# EAGLE board SparkFun_LilyPad-Button-Panel_v20 (EAGLE 7.7.0), part 1 of 3
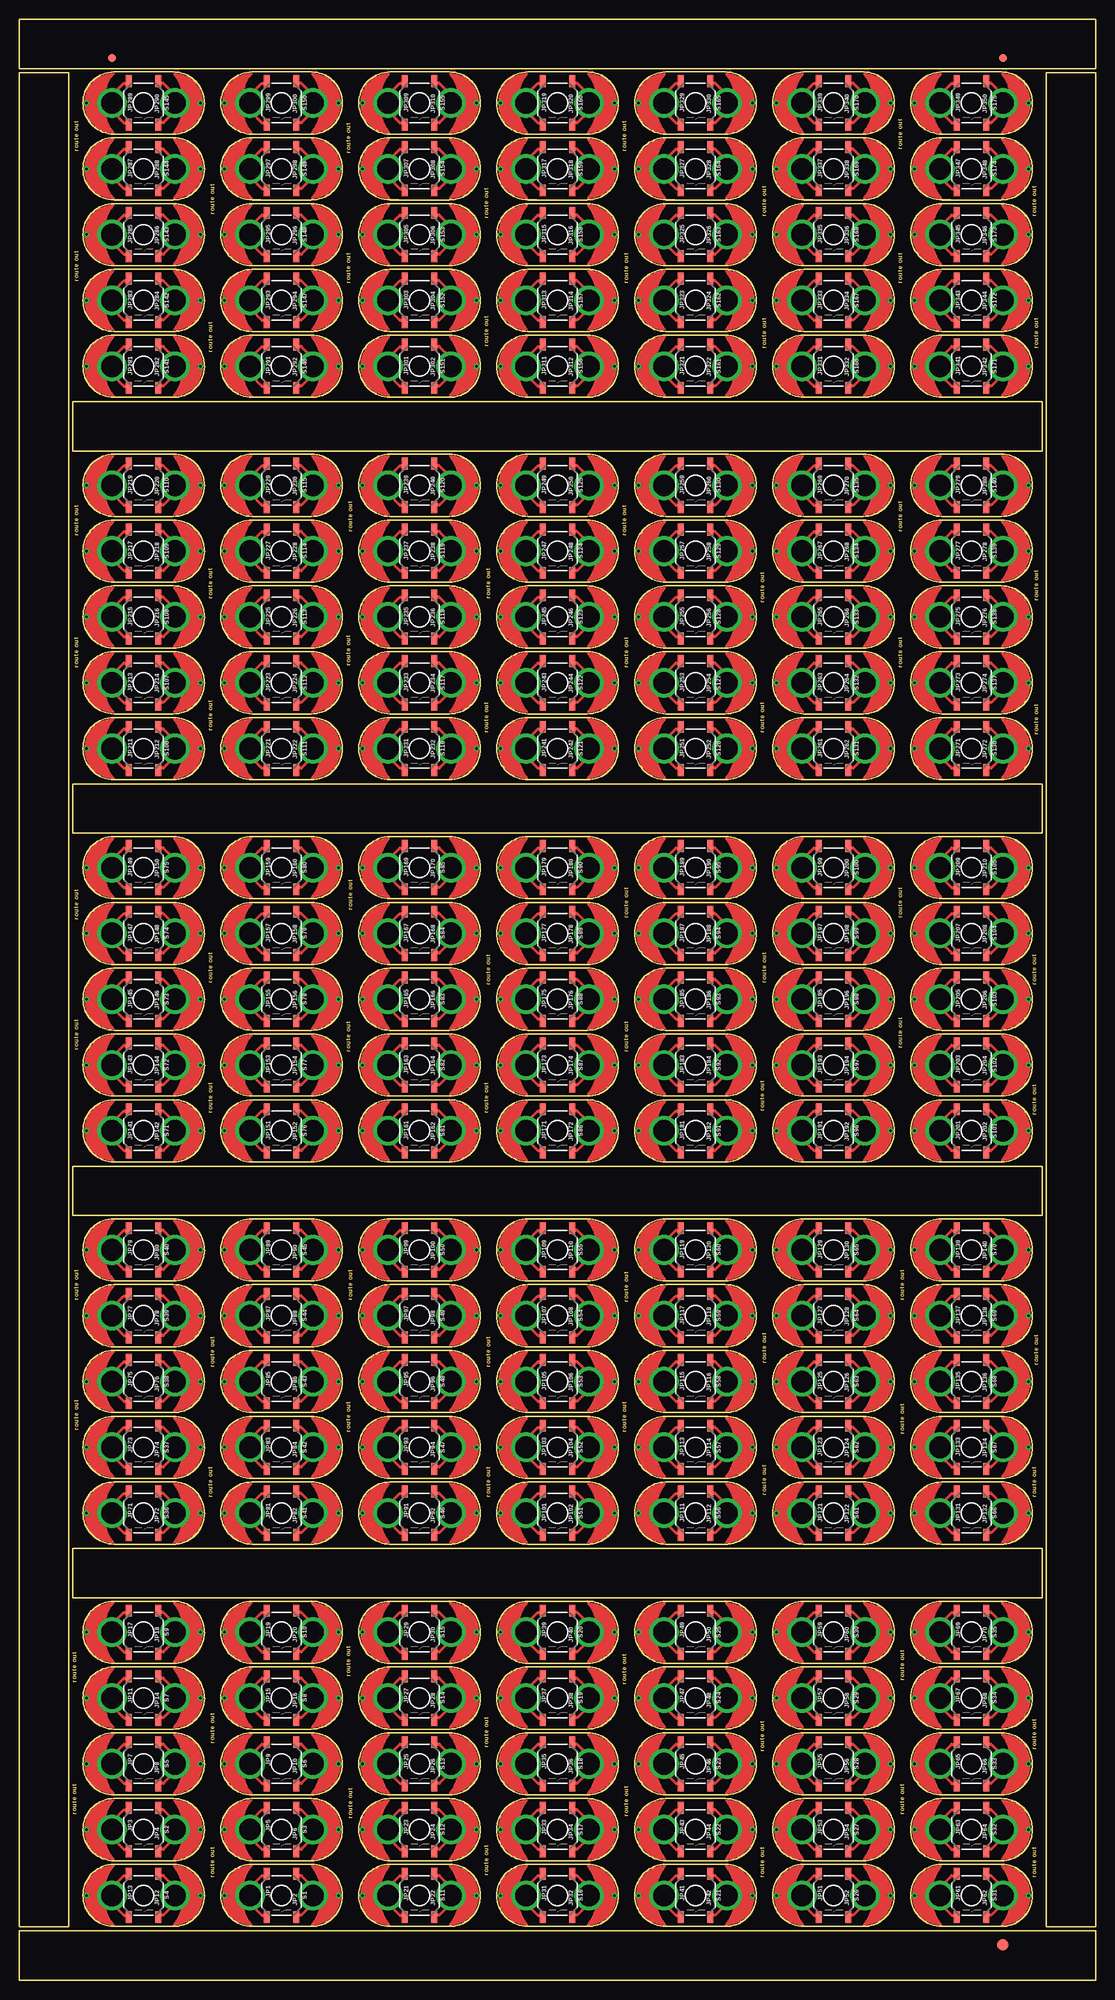
[diagram p0: board, top side]
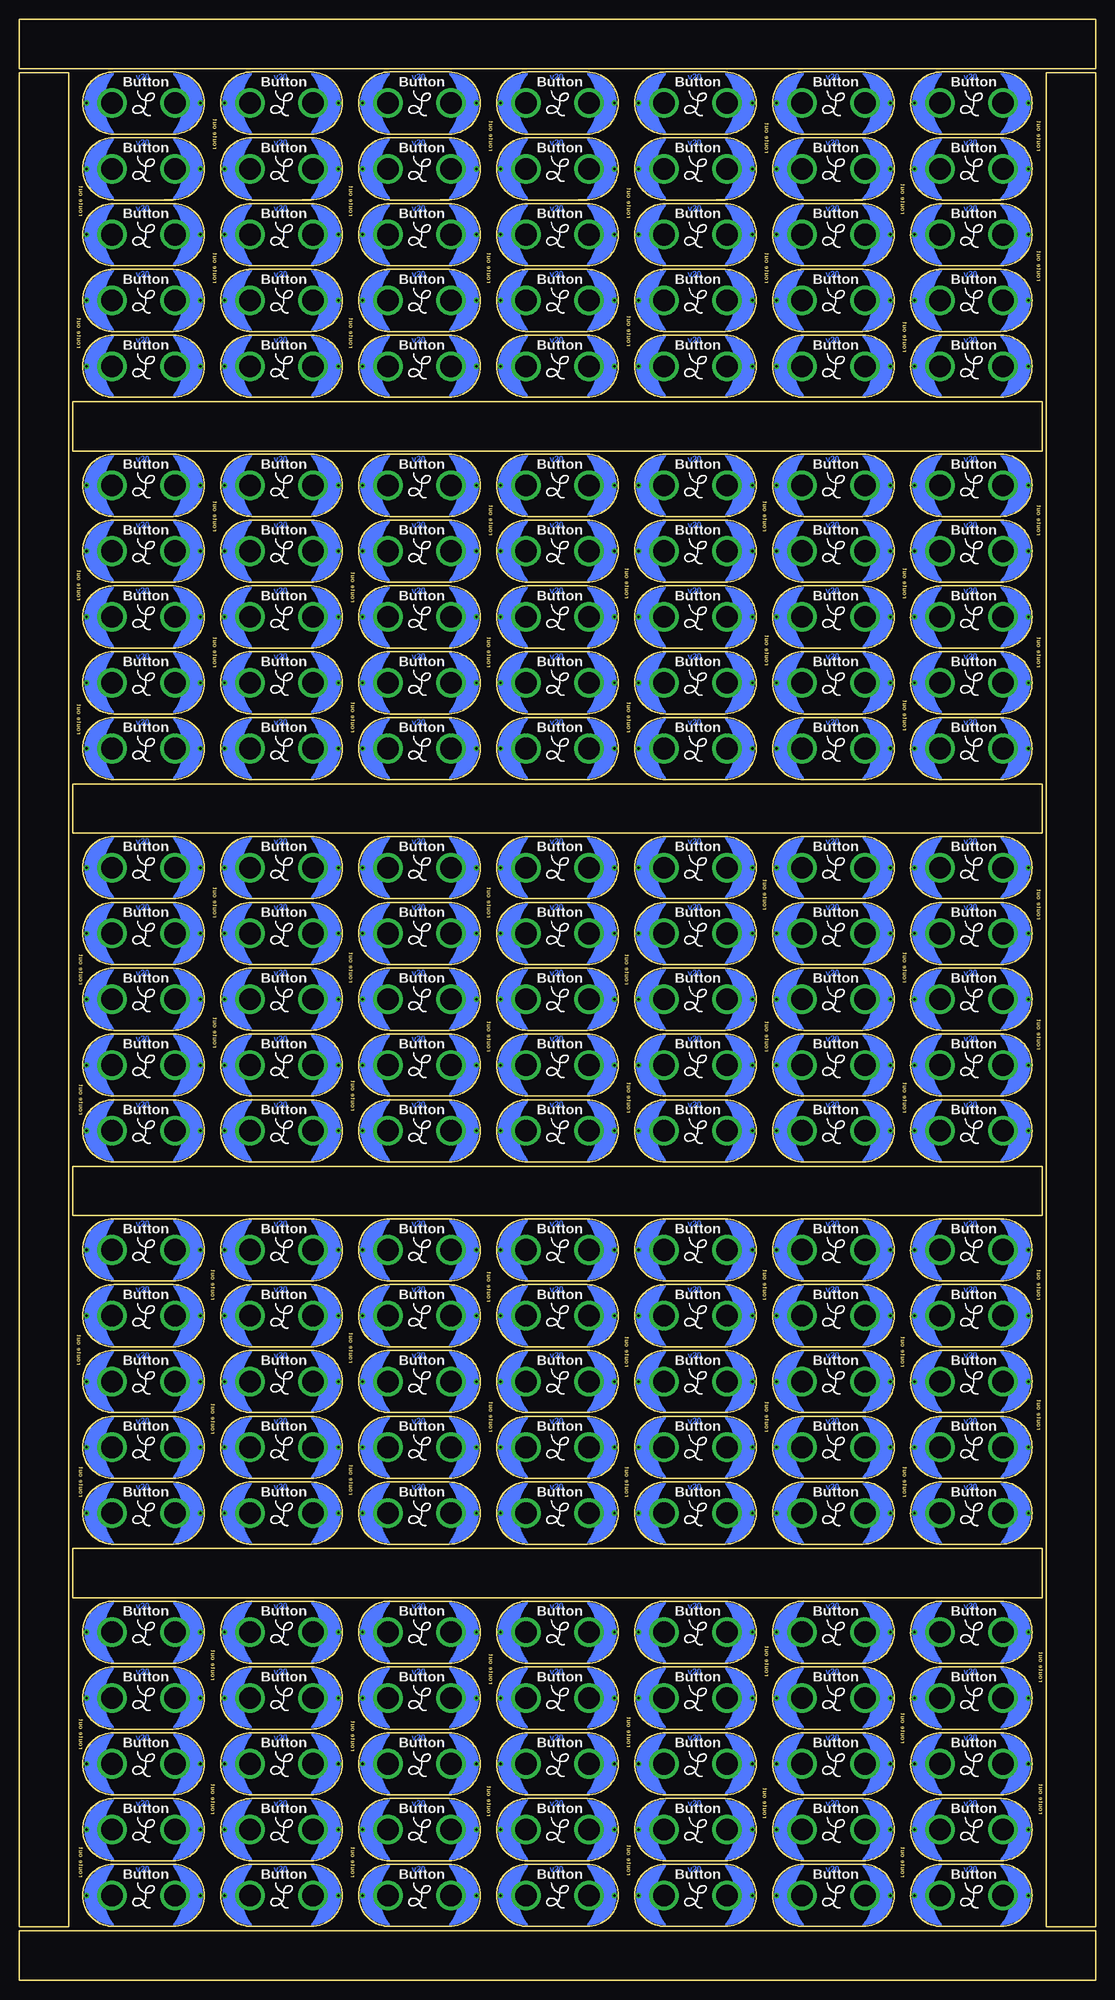
[diagram p1: board, bottom side, seen from below]

Size 138.68 x 252.73 mm. Coordinates in mm from the lower left corner, seen from the top.
Outline: 1798 segments
Copper layers (1*16): Top 0.035mm / dielectric 1.5mm / Bottom 0.035mm
Design rules "SparkFun-2-layer-TIGHT *": minimum track width 7mil, minimum drill 15mil, track to track 8mil, track to pad 8mil, pad to pad 8mil, via to via 8mil, smd to smd 8mil, copper to edge 7mil, drill to drill 7mil, minimum pad ring 7mil, minimum via ring 7mil, stop-mask expansion 4mil, vias tented up to drill 25mil, thermal gap 10mil

## Footprints (pad centres in the part's own frame; a part is rotated, then mirrored left to right if it is on the bottom)
FIDUCIAL-1.5X3 = smd 1.5 x 1.5: 1 0,0
FIDUCIAL-1X2 = smd 1 x 1: 1 0,0
PETAL-MEDIUM-2SIDE = drill 2.794: 1 0,-0.254
TACTILE_SWITCH_SMD_5.2MM = smd 1.524 x 0.762: 1 -2.794,1.905; 2 2.794,1.905; 3 -2.794,-1.905; 4 2.794,-1.905

## Placement (x,y rotation side)
E$1  [FIDUCIAL-1.5X3]  126.75,4.57 0 top
E$15  [FIDUCIAL-1X2]  11.94,247.78 270 top
E$16  [FIDUCIAL-1X2]  126.75,247.78 90 top
JP1  SEWTAP_MEDIUM-2SIDE  [PETAL-MEDIUM-2SIDE]  29.97,10.92 270 top
JP2  SEWTAP_MEDIUM-2SIDE  [PETAL-MEDIUM-2SIDE]  37.59,10.92 90 top
JP3  SEWTAP_MEDIUM-2SIDE  [PETAL-MEDIUM-2SIDE]  12.19,19.4 270 top
JP4  SEWTAP_MEDIUM-2SIDE  [PETAL-MEDIUM-2SIDE]  19.81,19.4 90 top
JP5  SEWTAP_MEDIUM-2SIDE  [PETAL-MEDIUM-2SIDE]  29.97,19.4 270 top
JP6  SEWTAP_MEDIUM-2SIDE  [PETAL-MEDIUM-2SIDE]  37.59,19.4 90 top
JP7  SEWTAP_MEDIUM-2SIDE  [PETAL-MEDIUM-2SIDE]  12.19,27.88 270 top
JP8  SEWTAP_MEDIUM-2SIDE  [PETAL-MEDIUM-2SIDE]  19.81,27.88 90 top
JP9  SEWTAP_MEDIUM-2SIDE  [PETAL-MEDIUM-2SIDE]  29.97,27.88 270 top
JP10  SEWTAP_MEDIUM-2SIDE  [PETAL-MEDIUM-2SIDE]  37.59,27.88 90 top
JP11  SEWTAP_MEDIUM-2SIDE  [PETAL-MEDIUM-2SIDE]  12.19,36.36 270 top
JP12  SEWTAP_MEDIUM-2SIDE  [PETAL-MEDIUM-2SIDE]  19.81,10.92 90 top
JP13  SEWTAP_MEDIUM-2SIDE  [PETAL-MEDIUM-2SIDE]  12.19,10.92 270 top
JP14  SEWTAP_MEDIUM-2SIDE  [PETAL-MEDIUM-2SIDE]  19.81,36.36 90 top
JP15  SEWTAP_MEDIUM-2SIDE  [PETAL-MEDIUM-2SIDE]  29.97,36.36 270 top
JP16  SEWTAP_MEDIUM-2SIDE  [PETAL-MEDIUM-2SIDE]  37.59,36.36 90 top
JP17  SEWTAP_MEDIUM-2SIDE  [PETAL-MEDIUM-2SIDE]  12.19,44.84 270 top
JP18  SEWTAP_MEDIUM-2SIDE  [PETAL-MEDIUM-2SIDE]  19.81,44.84 90 top
JP19  SEWTAP_MEDIUM-2SIDE  [PETAL-MEDIUM-2SIDE]  29.97,44.84 270 top
JP20  SEWTAP_MEDIUM-2SIDE  [PETAL-MEDIUM-2SIDE]  37.59,44.84 90 top
JP21  SEWTAP_MEDIUM-2SIDE  [PETAL-MEDIUM-2SIDE]  47.75,10.92 270 top
JP22  SEWTAP_MEDIUM-2SIDE  [PETAL-MEDIUM-2SIDE]  55.37,10.92 90 top
JP23  SEWTAP_MEDIUM-2SIDE  [PETAL-MEDIUM-2SIDE]  47.75,19.4 270 top
JP24  SEWTAP_MEDIUM-2SIDE  [PETAL-MEDIUM-2SIDE]  55.37,19.4 90 top
JP25  SEWTAP_MEDIUM-2SIDE  [PETAL-MEDIUM-2SIDE]  47.75,27.88 270 top
JP26  SEWTAP_MEDIUM-2SIDE  [PETAL-MEDIUM-2SIDE]  55.37,27.88 90 top
JP27  SEWTAP_MEDIUM-2SIDE  [PETAL-MEDIUM-2SIDE]  47.75,36.36 270 top
JP28  SEWTAP_MEDIUM-2SIDE  [PETAL-MEDIUM-2SIDE]  55.37,36.36 90 top
JP29  SEWTAP_MEDIUM-2SIDE  [PETAL-MEDIUM-2SIDE]  47.75,44.84 270 top
JP30  SEWTAP_MEDIUM-2SIDE  [PETAL-MEDIUM-2SIDE]  55.37,44.84 90 top
JP31  SEWTAP_MEDIUM-2SIDE  [PETAL-MEDIUM-2SIDE]  65.53,10.92 270 top
JP32  SEWTAP_MEDIUM-2SIDE  [PETAL-MEDIUM-2SIDE]  73.15,10.92 90 top
JP33  SEWTAP_MEDIUM-2SIDE  [PETAL-MEDIUM-2SIDE]  65.53,19.4 270 top
JP34  SEWTAP_MEDIUM-2SIDE  [PETAL-MEDIUM-2SIDE]  73.15,19.4 90 top
JP35  SEWTAP_MEDIUM-2SIDE  [PETAL-MEDIUM-2SIDE]  65.53,27.88 270 top
JP36  SEWTAP_MEDIUM-2SIDE  [PETAL-MEDIUM-2SIDE]  73.15,27.88 90 top
JP37  SEWTAP_MEDIUM-2SIDE  [PETAL-MEDIUM-2SIDE]  65.53,36.36 270 top
JP38  SEWTAP_MEDIUM-2SIDE  [PETAL-MEDIUM-2SIDE]  73.15,36.36 90 top
JP39  SEWTAP_MEDIUM-2SIDE  [PETAL-MEDIUM-2SIDE]  65.53,44.84 270 top
JP40  SEWTAP_MEDIUM-2SIDE  [PETAL-MEDIUM-2SIDE]  73.15,44.84 90 top
JP41  SEWTAP_MEDIUM-2SIDE  [PETAL-MEDIUM-2SIDE]  83.31,10.92 270 top
JP42  SEWTAP_MEDIUM-2SIDE  [PETAL-MEDIUM-2SIDE]  90.93,10.92 90 top
JP43  SEWTAP_MEDIUM-2SIDE  [PETAL-MEDIUM-2SIDE]  83.31,19.4 270 top
JP44  SEWTAP_MEDIUM-2SIDE  [PETAL-MEDIUM-2SIDE]  90.93,19.4 90 top
JP45  SEWTAP_MEDIUM-2SIDE  [PETAL-MEDIUM-2SIDE]  83.31,27.88 270 top
JP46  SEWTAP_MEDIUM-2SIDE  [PETAL-MEDIUM-2SIDE]  90.93,27.88 90 top
JP47  SEWTAP_MEDIUM-2SIDE  [PETAL-MEDIUM-2SIDE]  83.31,36.36 270 top
JP48  SEWTAP_MEDIUM-2SIDE  [PETAL-MEDIUM-2SIDE]  90.93,36.36 90 top
JP49  SEWTAP_MEDIUM-2SIDE  [PETAL-MEDIUM-2SIDE]  83.31,44.84 270 top
JP50  SEWTAP_MEDIUM-2SIDE  [PETAL-MEDIUM-2SIDE]  90.93,44.84 90 top
JP51  SEWTAP_MEDIUM-2SIDE  [PETAL-MEDIUM-2SIDE]  101.09,10.92 270 top
JP52  SEWTAP_MEDIUM-2SIDE  [PETAL-MEDIUM-2SIDE]  108.71,10.92 90 top
JP53  SEWTAP_MEDIUM-2SIDE  [PETAL-MEDIUM-2SIDE]  101.09,19.4 270 top
JP54  SEWTAP_MEDIUM-2SIDE  [PETAL-MEDIUM-2SIDE]  108.71,19.4 90 top
JP55  SEWTAP_MEDIUM-2SIDE  [PETAL-MEDIUM-2SIDE]  101.09,27.88 270 top
JP56  SEWTAP_MEDIUM-2SIDE  [PETAL-MEDIUM-2SIDE]  108.71,27.88 90 top
JP57  SEWTAP_MEDIUM-2SIDE  [PETAL-MEDIUM-2SIDE]  101.09,36.36 270 top
JP58  SEWTAP_MEDIUM-2SIDE  [PETAL-MEDIUM-2SIDE]  108.71,36.36 90 top
JP59  SEWTAP_MEDIUM-2SIDE  [PETAL-MEDIUM-2SIDE]  101.09,44.84 270 top
JP60  SEWTAP_MEDIUM-2SIDE  [PETAL-MEDIUM-2SIDE]  108.71,44.84 90 top
JP61  SEWTAP_MEDIUM-2SIDE  [PETAL-MEDIUM-2SIDE]  118.87,10.92 270 top
JP62  SEWTAP_MEDIUM-2SIDE  [PETAL-MEDIUM-2SIDE]  126.49,10.92 90 top
JP63  SEWTAP_MEDIUM-2SIDE  [PETAL-MEDIUM-2SIDE]  118.87,19.4 270 top
JP64  SEWTAP_MEDIUM-2SIDE  [PETAL-MEDIUM-2SIDE]  126.49,19.4 90 top
JP65  SEWTAP_MEDIUM-2SIDE  [PETAL-MEDIUM-2SIDE]  118.87,27.88 270 top
JP66  SEWTAP_MEDIUM-2SIDE  [PETAL-MEDIUM-2SIDE]  126.49,27.88 90 top
JP67  SEWTAP_MEDIUM-2SIDE  [PETAL-MEDIUM-2SIDE]  118.87,36.36 270 top
JP68  SEWTAP_MEDIUM-2SIDE  [PETAL-MEDIUM-2SIDE]  126.49,36.36 90 top
JP69  SEWTAP_MEDIUM-2SIDE  [PETAL-MEDIUM-2SIDE]  118.87,44.84 270 top
JP70  SEWTAP_MEDIUM-2SIDE  [PETAL-MEDIUM-2SIDE]  126.49,44.84 90 top
JP71  SEWTAP_MEDIUM-2SIDE  [PETAL-MEDIUM-2SIDE]  12.19,60.19 270 top
JP72  SEWTAP_MEDIUM-2SIDE  [PETAL-MEDIUM-2SIDE]  19.81,60.19 90 top
JP73  SEWTAP_MEDIUM-2SIDE  [PETAL-MEDIUM-2SIDE]  12.19,68.67 270 top
JP74  SEWTAP_MEDIUM-2SIDE  [PETAL-MEDIUM-2SIDE]  19.81,68.67 90 top
JP75  SEWTAP_MEDIUM-2SIDE  [PETAL-MEDIUM-2SIDE]  12.19,77.16 270 top
JP76  SEWTAP_MEDIUM-2SIDE  [PETAL-MEDIUM-2SIDE]  19.81,77.16 90 top
JP77  SEWTAP_MEDIUM-2SIDE  [PETAL-MEDIUM-2SIDE]  12.19,85.64 270 top
JP78  SEWTAP_MEDIUM-2SIDE  [PETAL-MEDIUM-2SIDE]  19.81,85.64 90 top
JP79  SEWTAP_MEDIUM-2SIDE  [PETAL-MEDIUM-2SIDE]  12.19,94.12 270 top
JP80  SEWTAP_MEDIUM-2SIDE  [PETAL-MEDIUM-2SIDE]  19.81,94.12 90 top
JP81  SEWTAP_MEDIUM-2SIDE  [PETAL-MEDIUM-2SIDE]  29.97,60.19 270 top
JP82  SEWTAP_MEDIUM-2SIDE  [PETAL-MEDIUM-2SIDE]  37.59,60.19 90 top
JP83  SEWTAP_MEDIUM-2SIDE  [PETAL-MEDIUM-2SIDE]  29.97,68.67 270 top
JP84  SEWTAP_MEDIUM-2SIDE  [PETAL-MEDIUM-2SIDE]  37.59,68.67 90 top
JP85  SEWTAP_MEDIUM-2SIDE  [PETAL-MEDIUM-2SIDE]  29.97,77.16 270 top
JP86  SEWTAP_MEDIUM-2SIDE  [PETAL-MEDIUM-2SIDE]  37.59,77.16 90 top
JP87  SEWTAP_MEDIUM-2SIDE  [PETAL-MEDIUM-2SIDE]  29.97,85.64 270 top
JP88  SEWTAP_MEDIUM-2SIDE  [PETAL-MEDIUM-2SIDE]  37.59,85.64 90 top
JP89  SEWTAP_MEDIUM-2SIDE  [PETAL-MEDIUM-2SIDE]  29.97,94.12 270 top
JP90  SEWTAP_MEDIUM-2SIDE  [PETAL-MEDIUM-2SIDE]  37.59,94.12 90 top
JP91  SEWTAP_MEDIUM-2SIDE  [PETAL-MEDIUM-2SIDE]  47.75,60.19 270 top
JP92  SEWTAP_MEDIUM-2SIDE  [PETAL-MEDIUM-2SIDE]  55.37,60.19 90 top
JP93  SEWTAP_MEDIUM-2SIDE  [PETAL-MEDIUM-2SIDE]  47.75,68.67 270 top
JP94  SEWTAP_MEDIUM-2SIDE  [PETAL-MEDIUM-2SIDE]  55.37,68.67 90 top
JP95  SEWTAP_MEDIUM-2SIDE  [PETAL-MEDIUM-2SIDE]  47.75,77.16 270 top
JP96  SEWTAP_MEDIUM-2SIDE  [PETAL-MEDIUM-2SIDE]  55.37,77.16 90 top
JP97  SEWTAP_MEDIUM-2SIDE  [PETAL-MEDIUM-2SIDE]  47.75,85.64 270 top
JP98  SEWTAP_MEDIUM-2SIDE  [PETAL-MEDIUM-2SIDE]  55.37,85.64 90 top
JP99  SEWTAP_MEDIUM-2SIDE  [PETAL-MEDIUM-2SIDE]  47.75,94.12 270 top
JP100  SEWTAP_MEDIUM-2SIDE  [PETAL-MEDIUM-2SIDE]  55.37,94.12 90 top
JP101  SEWTAP_MEDIUM-2SIDE  [PETAL-MEDIUM-2SIDE]  65.53,60.19 270 top
JP102  SEWTAP_MEDIUM-2SIDE  [PETAL-MEDIUM-2SIDE]  73.15,60.19 90 top
JP103  SEWTAP_MEDIUM-2SIDE  [PETAL-MEDIUM-2SIDE]  65.53,68.67 270 top
JP104  SEWTAP_MEDIUM-2SIDE  [PETAL-MEDIUM-2SIDE]  73.15,68.67 90 top
JP105  SEWTAP_MEDIUM-2SIDE  [PETAL-MEDIUM-2SIDE]  65.53,77.16 270 top
JP106  SEWTAP_MEDIUM-2SIDE  [PETAL-MEDIUM-2SIDE]  73.15,77.16 90 top
JP107  SEWTAP_MEDIUM-2SIDE  [PETAL-MEDIUM-2SIDE]  65.53,85.64 270 top
JP108  SEWTAP_MEDIUM-2SIDE  [PETAL-MEDIUM-2SIDE]  73.15,85.64 90 top
JP109  SEWTAP_MEDIUM-2SIDE  [PETAL-MEDIUM-2SIDE]  65.53,94.12 270 top
JP110  SEWTAP_MEDIUM-2SIDE  [PETAL-MEDIUM-2SIDE]  73.15,94.12 90 top
JP111  SEWTAP_MEDIUM-2SIDE  [PETAL-MEDIUM-2SIDE]  83.31,60.19 270 top
JP112  SEWTAP_MEDIUM-2SIDE  [PETAL-MEDIUM-2SIDE]  90.93,60.19 90 top
JP113  SEWTAP_MEDIUM-2SIDE  [PETAL-MEDIUM-2SIDE]  83.31,68.67 270 top
JP114  SEWTAP_MEDIUM-2SIDE  [PETAL-MEDIUM-2SIDE]  90.93,68.67 90 top
JP115  SEWTAP_MEDIUM-2SIDE  [PETAL-MEDIUM-2SIDE]  83.31,77.16 270 top
JP116  SEWTAP_MEDIUM-2SIDE  [PETAL-MEDIUM-2SIDE]  90.93,77.16 90 top
JP117  SEWTAP_MEDIUM-2SIDE  [PETAL-MEDIUM-2SIDE]  83.31,85.64 270 top
JP118  SEWTAP_MEDIUM-2SIDE  [PETAL-MEDIUM-2SIDE]  90.93,85.64 90 top
JP119  SEWTAP_MEDIUM-2SIDE  [PETAL-MEDIUM-2SIDE]  83.31,94.12 270 top
JP120  SEWTAP_MEDIUM-2SIDE  [PETAL-MEDIUM-2SIDE]  90.93,94.12 90 top
JP121  SEWTAP_MEDIUM-2SIDE  [PETAL-MEDIUM-2SIDE]  101.09,60.19 270 top
JP122  SEWTAP_MEDIUM-2SIDE  [PETAL-MEDIUM-2SIDE]  108.71,60.19 90 top
JP123  SEWTAP_MEDIUM-2SIDE  [PETAL-MEDIUM-2SIDE]  101.09,68.67 270 top
JP124  SEWTAP_MEDIUM-2SIDE  [PETAL-MEDIUM-2SIDE]  108.71,68.67 90 top
JP125  SEWTAP_MEDIUM-2SIDE  [PETAL-MEDIUM-2SIDE]  101.09,77.16 270 top
JP126  SEWTAP_MEDIUM-2SIDE  [PETAL-MEDIUM-2SIDE]  108.71,77.16 90 top
JP127  SEWTAP_MEDIUM-2SIDE  [PETAL-MEDIUM-2SIDE]  101.09,85.64 270 top
JP128  SEWTAP_MEDIUM-2SIDE  [PETAL-MEDIUM-2SIDE]  108.71,85.64 90 top
JP129  SEWTAP_MEDIUM-2SIDE  [PETAL-MEDIUM-2SIDE]  101.09,94.12 270 top
JP130  SEWTAP_MEDIUM-2SIDE  [PETAL-MEDIUM-2SIDE]  108.71,94.12 90 top
JP131  SEWTAP_MEDIUM-2SIDE  [PETAL-MEDIUM-2SIDE]  118.87,60.19 270 top
JP132  SEWTAP_MEDIUM-2SIDE  [PETAL-MEDIUM-2SIDE]  126.49,60.19 90 top
JP133  SEWTAP_MEDIUM-2SIDE  [PETAL-MEDIUM-2SIDE]  118.87,68.67 270 top
JP134  SEWTAP_MEDIUM-2SIDE  [PETAL-MEDIUM-2SIDE]  126.49,68.67 90 top
JP135  SEWTAP_MEDIUM-2SIDE  [PETAL-MEDIUM-2SIDE]  118.87,77.16 270 top
JP136  SEWTAP_MEDIUM-2SIDE  [PETAL-MEDIUM-2SIDE]  126.49,77.16 90 top
JP137  SEWTAP_MEDIUM-2SIDE  [PETAL-MEDIUM-2SIDE]  118.87,85.64 270 top
JP138  SEWTAP_MEDIUM-2SIDE  [PETAL-MEDIUM-2SIDE]  126.49,85.64 90 top
JP139  SEWTAP_MEDIUM-2SIDE  [PETAL-MEDIUM-2SIDE]  118.87,94.12 270 top
JP140  SEWTAP_MEDIUM-2SIDE  [PETAL-MEDIUM-2SIDE]  126.49,94.12 90 top
JP141  SEWTAP_MEDIUM-2SIDE  [PETAL-MEDIUM-2SIDE]  12.19,109.47 270 top
JP142  SEWTAP_MEDIUM-2SIDE  [PETAL-MEDIUM-2SIDE]  19.81,109.47 90 top
JP143  SEWTAP_MEDIUM-2SIDE  [PETAL-MEDIUM-2SIDE]  12.19,117.95 270 top
JP144  SEWTAP_MEDIUM-2SIDE  [PETAL-MEDIUM-2SIDE]  19.81,117.95 90 top
JP145  SEWTAP_MEDIUM-2SIDE  [PETAL-MEDIUM-2SIDE]  12.19,126.43 270 top
JP146  SEWTAP_MEDIUM-2SIDE  [PETAL-MEDIUM-2SIDE]  19.81,126.43 90 top
JP147  SEWTAP_MEDIUM-2SIDE  [PETAL-MEDIUM-2SIDE]  12.19,134.91 270 top
JP148  SEWTAP_MEDIUM-2SIDE  [PETAL-MEDIUM-2SIDE]  19.81,134.91 90 top
JP149  SEWTAP_MEDIUM-2SIDE  [PETAL-MEDIUM-2SIDE]  12.19,143.39 270 top
JP150  SEWTAP_MEDIUM-2SIDE  [PETAL-MEDIUM-2SIDE]  19.81,143.39 90 top
JP151  SEWTAP_MEDIUM-2SIDE  [PETAL-MEDIUM-2SIDE]  29.97,109.47 270 top
JP152  SEWTAP_MEDIUM-2SIDE  [PETAL-MEDIUM-2SIDE]  37.59,109.47 90 top
JP153  SEWTAP_MEDIUM-2SIDE  [PETAL-MEDIUM-2SIDE]  29.97,117.95 270 top
JP154  SEWTAP_MEDIUM-2SIDE  [PETAL-MEDIUM-2SIDE]  37.59,117.95 90 top
JP155  SEWTAP_MEDIUM-2SIDE  [PETAL-MEDIUM-2SIDE]  29.97,126.43 270 top
JP156  SEWTAP_MEDIUM-2SIDE  [PETAL-MEDIUM-2SIDE]  37.59,126.43 90 top
JP157  SEWTAP_MEDIUM-2SIDE  [PETAL-MEDIUM-2SIDE]  29.97,134.91 270 top
JP158  SEWTAP_MEDIUM-2SIDE  [PETAL-MEDIUM-2SIDE]  37.59,134.91 90 top
JP159  SEWTAP_MEDIUM-2SIDE  [PETAL-MEDIUM-2SIDE]  29.97,143.39 270 top
JP160  SEWTAP_MEDIUM-2SIDE  [PETAL-MEDIUM-2SIDE]  37.59,143.39 90 top
JP161  SEWTAP_MEDIUM-2SIDE  [PETAL-MEDIUM-2SIDE]  47.75,109.47 270 top
JP162  SEWTAP_MEDIUM-2SIDE  [PETAL-MEDIUM-2SIDE]  55.37,109.47 90 top
JP163  SEWTAP_MEDIUM-2SIDE  [PETAL-MEDIUM-2SIDE]  47.75,117.95 270 top
JP164  SEWTAP_MEDIUM-2SIDE  [PETAL-MEDIUM-2SIDE]  55.37,117.95 90 top
JP165  SEWTAP_MEDIUM-2SIDE  [PETAL-MEDIUM-2SIDE]  47.75,126.43 270 top
JP166  SEWTAP_MEDIUM-2SIDE  [PETAL-MEDIUM-2SIDE]  55.37,126.43 90 top
JP167  SEWTAP_MEDIUM-2SIDE  [PETAL-MEDIUM-2SIDE]  47.75,134.91 270 top
JP168  SEWTAP_MEDIUM-2SIDE  [PETAL-MEDIUM-2SIDE]  55.37,134.91 90 top
JP169  SEWTAP_MEDIUM-2SIDE  [PETAL-MEDIUM-2SIDE]  47.75,143.39 270 top
JP170  SEWTAP_MEDIUM-2SIDE  [PETAL-MEDIUM-2SIDE]  55.37,143.39 90 top
JP171  SEWTAP_MEDIUM-2SIDE  [PETAL-MEDIUM-2SIDE]  65.53,109.47 270 top
JP172  SEWTAP_MEDIUM-2SIDE  [PETAL-MEDIUM-2SIDE]  73.15,109.47 90 top
JP173  SEWTAP_MEDIUM-2SIDE  [PETAL-MEDIUM-2SIDE]  65.53,117.95 270 top
JP174  SEWTAP_MEDIUM-2SIDE  [PETAL-MEDIUM-2SIDE]  73.15,117.95 90 top
JP175  SEWTAP_MEDIUM-2SIDE  [PETAL-MEDIUM-2SIDE]  65.53,126.43 270 top
JP176  SEWTAP_MEDIUM-2SIDE  [PETAL-MEDIUM-2SIDE]  73.15,126.43 90 top
JP177  SEWTAP_MEDIUM-2SIDE  [PETAL-MEDIUM-2SIDE]  65.53,134.91 270 top
JP178  SEWTAP_MEDIUM-2SIDE  [PETAL-MEDIUM-2SIDE]  73.15,134.91 90 top
JP179  SEWTAP_MEDIUM-2SIDE  [PETAL-MEDIUM-2SIDE]  65.53,143.39 270 top
JP180  SEWTAP_MEDIUM-2SIDE  [PETAL-MEDIUM-2SIDE]  73.15,143.39 90 top
JP181  SEWTAP_MEDIUM-2SIDE  [PETAL-MEDIUM-2SIDE]  83.31,109.47 270 top
JP182  SEWTAP_MEDIUM-2SIDE  [PETAL-MEDIUM-2SIDE]  90.93,109.47 90 top
JP183  SEWTAP_MEDIUM-2SIDE  [PETAL-MEDIUM-2SIDE]  83.31,117.95 270 top
JP184  SEWTAP_MEDIUM-2SIDE  [PETAL-MEDIUM-2SIDE]  90.93,117.95 90 top
JP185  SEWTAP_MEDIUM-2SIDE  [PETAL-MEDIUM-2SIDE]  83.31,126.43 270 top
JP186  SEWTAP_MEDIUM-2SIDE  [PETAL-MEDIUM-2SIDE]  90.93,126.43 90 top
JP187  SEWTAP_MEDIUM-2SIDE  [PETAL-MEDIUM-2SIDE]  83.31,134.91 270 top
JP188  SEWTAP_MEDIUM-2SIDE  [PETAL-MEDIUM-2SIDE]  90.93,134.91 90 top
JP189  SEWTAP_MEDIUM-2SIDE  [PETAL-MEDIUM-2SIDE]  83.31,143.39 270 top
JP190  SEWTAP_MEDIUM-2SIDE  [PETAL-MEDIUM-2SIDE]  90.93,143.39 90 top
JP191  SEWTAP_MEDIUM-2SIDE  [PETAL-MEDIUM-2SIDE]  101.09,109.47 270 top
JP192  SEWTAP_MEDIUM-2SIDE  [PETAL-MEDIUM-2SIDE]  108.71,109.47 90 top
JP193  SEWTAP_MEDIUM-2SIDE  [PETAL-MEDIUM-2SIDE]  101.09,117.95 270 top
JP194  SEWTAP_MEDIUM-2SIDE  [PETAL-MEDIUM-2SIDE]  108.71,117.95 90 top
JP195  SEWTAP_MEDIUM-2SIDE  [PETAL-MEDIUM-2SIDE]  101.09,126.43 270 top
JP196  SEWTAP_MEDIUM-2SIDE  [PETAL-MEDIUM-2SIDE]  108.71,126.43 90 top
JP197  SEWTAP_MEDIUM-2SIDE  [PETAL-MEDIUM-2SIDE]  101.09,134.91 270 top
JP198  SEWTAP_MEDIUM-2SIDE  [PETAL-MEDIUM-2SIDE]  108.71,134.91 90 top
JP199  SEWTAP_MEDIUM-2SIDE  [PETAL-MEDIUM-2SIDE]  101.09,143.39 270 top
JP200  SEWTAP_MEDIUM-2SIDE  [PETAL-MEDIUM-2SIDE]  108.71,143.39 90 top
JP201  SEWTAP_MEDIUM-2SIDE  [PETAL-MEDIUM-2SIDE]  118.87,109.47 270 top
JP202  SEWTAP_MEDIUM-2SIDE  [PETAL-MEDIUM-2SIDE]  126.49,109.47 90 top
JP203  SEWTAP_MEDIUM-2SIDE  [PETAL-MEDIUM-2SIDE]  118.87,117.95 270 top
JP204  SEWTAP_MEDIUM-2SIDE  [PETAL-MEDIUM-2SIDE]  126.49,117.95 90 top
JP205  SEWTAP_MEDIUM-2SIDE  [PETAL-MEDIUM-2SIDE]  118.87,126.43 270 top
JP206  SEWTAP_MEDIUM-2SIDE  [PETAL-MEDIUM-2SIDE]  126.49,126.43 90 top
JP207  SEWTAP_MEDIUM-2SIDE  [PETAL-MEDIUM-2SIDE]  118.87,134.91 270 top
JP208  SEWTAP_MEDIUM-2SIDE  [PETAL-MEDIUM-2SIDE]  126.49,134.91 90 top
JP209  SEWTAP_MEDIUM-2SIDE  [PETAL-MEDIUM-2SIDE]  118.87,143.39 270 top
JP210  SEWTAP_MEDIUM-2SIDE  [PETAL-MEDIUM-2SIDE]  126.49,143.39 90 top
JP211  SEWTAP_MEDIUM-2SIDE  [PETAL-MEDIUM-2SIDE]  12.19,158.75 270 top
JP212  SEWTAP_MEDIUM-2SIDE  [PETAL-MEDIUM-2SIDE]  19.81,158.75 90 top
JP213  SEWTAP_MEDIUM-2SIDE  [PETAL-MEDIUM-2SIDE]  12.19,167.23 270 top
JP214  SEWTAP_MEDIUM-2SIDE  [PETAL-MEDIUM-2SIDE]  19.81,167.23 90 top
JP215  SEWTAP_MEDIUM-2SIDE  [PETAL-MEDIUM-2SIDE]  12.19,175.71 270 top
JP216  SEWTAP_MEDIUM-2SIDE  [PETAL-MEDIUM-2SIDE]  19.81,175.71 90 top
JP217  SEWTAP_MEDIUM-2SIDE  [PETAL-MEDIUM-2SIDE]  12.19,184.19 270 top
JP218  SEWTAP_MEDIUM-2SIDE  [PETAL-MEDIUM-2SIDE]  19.81,184.19 90 top
JP219  SEWTAP_MEDIUM-2SIDE  [PETAL-MEDIUM-2SIDE]  12.19,192.67 270 top
JP220  SEWTAP_MEDIUM-2SIDE  [PETAL-MEDIUM-2SIDE]  19.81,192.67 90 top
JP221  SEWTAP_MEDIUM-2SIDE  [PETAL-MEDIUM-2SIDE]  29.97,158.75 270 top
JP222  SEWTAP_MEDIUM-2SIDE  [PETAL-MEDIUM-2SIDE]  37.59,158.75 90 top
JP223  SEWTAP_MEDIUM-2SIDE  [PETAL-MEDIUM-2SIDE]  29.97,167.23 270 top
JP224  SEWTAP_MEDIUM-2SIDE  [PETAL-MEDIUM-2SIDE]  37.59,167.23 90 top
JP225  SEWTAP_MEDIUM-2SIDE  [PETAL-MEDIUM-2SIDE]  29.97,175.71 270 top
JP226  SEWTAP_MEDIUM-2SIDE  [PETAL-MEDIUM-2SIDE]  37.59,175.71 90 top
JP227  SEWTAP_MEDIUM-2SIDE  [PETAL-MEDIUM-2SIDE]  29.97,184.19 270 top
JP228  SEWTAP_MEDIUM-2SIDE  [PETAL-MEDIUM-2SIDE]  37.59,184.19 90 top
JP229  SEWTAP_MEDIUM-2SIDE  [PETAL-MEDIUM-2SIDE]  29.97,192.67 270 top
JP230  SEWTAP_MEDIUM-2SIDE  [PETAL-MEDIUM-2SIDE]  37.59,192.67 90 top
JP231  SEWTAP_MEDIUM-2SIDE  [PETAL-MEDIUM-2SIDE]  47.75,158.75 270 top
JP232  SEWTAP_MEDIUM-2SIDE  [PETAL-MEDIUM-2SIDE]  55.37,158.75 90 top
JP233  SEWTAP_MEDIUM-2SIDE  [PETAL-MEDIUM-2SIDE]  47.75,167.23 270 top
JP234  SEWTAP_MEDIUM-2SIDE  [PETAL-MEDIUM-2SIDE]  55.37,167.23 90 top
JP235  SEWTAP_MEDIUM-2SIDE  [PETAL-MEDIUM-2SIDE]  47.75,175.71 270 top
JP236  SEWTAP_MEDIUM-2SIDE  [PETAL-MEDIUM-2SIDE]  55.37,175.71 90 top
JP237  SEWTAP_MEDIUM-2SIDE  [PETAL-MEDIUM-2SIDE]  47.75,184.19 270 top
JP238  SEWTAP_MEDIUM-2SIDE  [PETAL-MEDIUM-2SIDE]  55.37,184.19 90 top
JP239  SEWTAP_MEDIUM-2SIDE  [PETAL-MEDIUM-2SIDE]  47.75,192.67 270 top
JP240  SEWTAP_MEDIUM-2SIDE  [PETAL-MEDIUM-2SIDE]  55.37,192.67 90 top
JP241  SEWTAP_MEDIUM-2SIDE  [PETAL-MEDIUM-2SIDE]  65.53,158.75 270 top
JP242  SEWTAP_MEDIUM-2SIDE  [PETAL-MEDIUM-2SIDE]  73.15,158.75 90 top
JP243  SEWTAP_MEDIUM-2SIDE  [PETAL-MEDIUM-2SIDE]  65.53,167.23 270 top
JP244  SEWTAP_MEDIUM-2SIDE  [PETAL-MEDIUM-2SIDE]  73.15,167.23 90 top
JP245  SEWTAP_MEDIUM-2SIDE  [PETAL-MEDIUM-2SIDE]  65.53,175.71 270 top
JP246  SEWTAP_MEDIUM-2SIDE  [PETAL-MEDIUM-2SIDE]  73.15,175.71 90 top
JP247  SEWTAP_MEDIUM-2SIDE  [PETAL-MEDIUM-2SIDE]  65.53,184.19 270 top
JP248  SEWTAP_MEDIUM-2SIDE  [PETAL-MEDIUM-2SIDE]  73.15,184.19 90 top
JP249  SEWTAP_MEDIUM-2SIDE  [PETAL-MEDIUM-2SIDE]  65.53,192.67 270 top
JP250  SEWTAP_MEDIUM-2SIDE  [PETAL-MEDIUM-2SIDE]  73.15,192.67 90 top
JP251  SEWTAP_MEDIUM-2SIDE  [PETAL-MEDIUM-2SIDE]  83.31,158.75 270 top
JP252  SEWTAP_MEDIUM-2SIDE  [PETAL-MEDIUM-2SIDE]  90.93,158.75 90 top
JP253  SEWTAP_MEDIUM-2SIDE  [PETAL-MEDIUM-2SIDE]  83.31,167.23 270 top
JP254  SEWTAP_MEDIUM-2SIDE  [PETAL-MEDIUM-2SIDE]  90.93,167.23 90 top
JP255  SEWTAP_MEDIUM-2SIDE  [PETAL-MEDIUM-2SIDE]  83.31,175.71 270 top
JP256  SEWTAP_MEDIUM-2SIDE  [PETAL-MEDIUM-2SIDE]  90.93,175.71 90 top
JP257  SEWTAP_MEDIUM-2SIDE  [PETAL-MEDIUM-2SIDE]  83.31,184.19 270 top
JP258  SEWTAP_MEDIUM-2SIDE  [PETAL-MEDIUM-2SIDE]  90.93,184.19 90 top
JP259  SEWTAP_MEDIUM-2SIDE  [PETAL-MEDIUM-2SIDE]  83.31,192.67 270 top
JP260  SEWTAP_MEDIUM-2SIDE  [PETAL-MEDIUM-2SIDE]  90.93,192.67 90 top
JP261  SEWTAP_MEDIUM-2SIDE  [PETAL-MEDIUM-2SIDE]  101.09,158.75 270 top
JP262  SEWTAP_MEDIUM-2SIDE  [PETAL-MEDIUM-2SIDE]  108.71,158.75 90 top
JP263  SEWTAP_MEDIUM-2SIDE  [PETAL-MEDIUM-2SIDE]  101.09,167.23 270 top
JP264  SEWTAP_MEDIUM-2SIDE  [PETAL-MEDIUM-2SIDE]  108.71,167.23 90 top
JP265  SEWTAP_MEDIUM-2SIDE  [PETAL-MEDIUM-2SIDE]  101.09,175.71 270 top
JP266  SEWTAP_MEDIUM-2SIDE  [PETAL-MEDIUM-2SIDE]  108.71,175.71 90 top
JP267  SEWTAP_MEDIUM-2SIDE  [PETAL-MEDIUM-2SIDE]  101.09,184.19 270 top
JP268  SEWTAP_MEDIUM-2SIDE  [PETAL-MEDIUM-2SIDE]  108.71,184.19 90 top
JP269  SEWTAP_MEDIUM-2SIDE  [PETAL-MEDIUM-2SIDE]  101.09,192.67 270 top
JP270  SEWTAP_MEDIUM-2SIDE  [PETAL-MEDIUM-2SIDE]  108.71,192.67 90 top
JP271  SEWTAP_MEDIUM-2SIDE  [PETAL-MEDIUM-2SIDE]  118.87,158.75 270 top
JP272  SEWTAP_MEDIUM-2SIDE  [PETAL-MEDIUM-2SIDE]  126.49,158.75 90 top
JP273  SEWTAP_MEDIUM-2SIDE  [PETAL-MEDIUM-2SIDE]  118.87,167.23 270 top
JP274  SEWTAP_MEDIUM-2SIDE  [PETAL-MEDIUM-2SIDE]  126.49,167.23 90 top
JP275  SEWTAP_MEDIUM-2SIDE  [PETAL-MEDIUM-2SIDE]  118.87,175.71 270 top
JP276  SEWTAP_MEDIUM-2SIDE  [PETAL-MEDIUM-2SIDE]  126.49,175.71 90 top
JP277  SEWTAP_MEDIUM-2SIDE  [PETAL-MEDIUM-2SIDE]  118.87,184.19 270 top
JP278  SEWTAP_MEDIUM-2SIDE  [PETAL-MEDIUM-2SIDE]  126.49,184.19 90 top
JP279  SEWTAP_MEDIUM-2SIDE  [PETAL-MEDIUM-2SIDE]  118.87,192.67 270 top
JP280  SEWTAP_MEDIUM-2SIDE  [PETAL-MEDIUM-2SIDE]  126.49,192.67 90 top
JP281  SEWTAP_MEDIUM-2SIDE  [PETAL-MEDIUM-2SIDE]  12.19,208.02 270 top
JP282  SEWTAP_MEDIUM-2SIDE  [PETAL-MEDIUM-2SIDE]  19.81,208.02 90 top
JP283  SEWTAP_MEDIUM-2SIDE  [PETAL-MEDIUM-2SIDE]  12.19,216.5 270 top
JP284  SEWTAP_MEDIUM-2SIDE  [PETAL-MEDIUM-2SIDE]  19.81,216.5 90 top
JP285  SEWTAP_MEDIUM-2SIDE  [PETAL-MEDIUM-2SIDE]  12.19,224.98 270 top
JP286  SEWTAP_MEDIUM-2SIDE  [PETAL-MEDIUM-2SIDE]  19.81,224.98 90 top
JP287  SEWTAP_MEDIUM-2SIDE  [PETAL-MEDIUM-2SIDE]  12.19,233.47 270 top
JP288  SEWTAP_MEDIUM-2SIDE  [PETAL-MEDIUM-2SIDE]  19.81,233.47 90 top
JP289  SEWTAP_MEDIUM-2SIDE  [PETAL-MEDIUM-2SIDE]  12.19,241.95 270 top
JP290  SEWTAP_MEDIUM-2SIDE  [PETAL-MEDIUM-2SIDE]  19.81,241.95 90 top
JP291  SEWTAP_MEDIUM-2SIDE  [PETAL-MEDIUM-2SIDE]  29.97,208.02 270 top
JP292  SEWTAP_MEDIUM-2SIDE  [PETAL-MEDIUM-2SIDE]  37.59,208.02 90 top
JP293  SEWTAP_MEDIUM-2SIDE  [PETAL-MEDIUM-2SIDE]  29.97,216.5 270 top
JP294  SEWTAP_MEDIUM-2SIDE  [PETAL-MEDIUM-2SIDE]  37.59,216.5 90 top
JP295  SEWTAP_MEDIUM-2SIDE  [PETAL-MEDIUM-2SIDE]  29.97,224.98 270 top
JP296  SEWTAP_MEDIUM-2SIDE  [PETAL-MEDIUM-2SIDE]  37.59,224.98 90 top
JP297  SEWTAP_MEDIUM-2SIDE  [PETAL-MEDIUM-2SIDE]  29.97,233.47 270 top
JP298  SEWTAP_MEDIUM-2SIDE  [PETAL-MEDIUM-2SIDE]  37.59,233.47 90 top
JP299  SEWTAP_MEDIUM-2SIDE  [PETAL-MEDIUM-2SIDE]  29.97,241.95 270 top
JP300  SEWTAP_MEDIUM-2SIDE  [PETAL-MEDIUM-2SIDE]  37.59,241.95 90 top
JP301  SEWTAP_MEDIUM-2SIDE  [PETAL-MEDIUM-2SIDE]  47.75,208.02 270 top
JP302  SEWTAP_MEDIUM-2SIDE  [PETAL-MEDIUM-2SIDE]  55.37,208.02 90 top
JP303  SEWTAP_MEDIUM-2SIDE  [PETAL-MEDIUM-2SIDE]  47.75,216.5 270 top
JP304  SEWTAP_MEDIUM-2SIDE  [PETAL-MEDIUM-2SIDE]  55.37,216.5 90 top
JP305  SEWTAP_MEDIUM-2SIDE  [PETAL-MEDIUM-2SIDE]  47.75,224.98 270 top
JP306  SEWTAP_MEDIUM-2SIDE  [PETAL-MEDIUM-2SIDE]  55.37,224.98 90 top
JP307  SEWTAP_MEDIUM-2SIDE  [PETAL-MEDIUM-2SIDE]  47.75,233.47 270 top
JP308  SEWTAP_MEDIUM-2SIDE  [PETAL-MEDIUM-2SIDE]  55.37,233.47 90 top
JP309  SEWTAP_MEDIUM-2SIDE  [PETAL-MEDIUM-2SIDE]  47.75,241.95 270 top
JP310  SEWTAP_MEDIUM-2SIDE  [PETAL-MEDIUM-2SIDE]  55.37,241.95 90 top
JP311  SEWTAP_MEDIUM-2SIDE  [PETAL-MEDIUM-2SIDE]  65.53,208.02 270 top
JP312  SEWTAP_MEDIUM-2SIDE  [PETAL-MEDIUM-2SIDE]  73.15,208.02 90 top
JP313  SEWTAP_MEDIUM-2SIDE  [PETAL-MEDIUM-2SIDE]  65.53,216.5 270 top
JP314  SEWTAP_MEDIUM-2SIDE  [PETAL-MEDIUM-2SIDE]  73.15,216.5 90 top
JP315  SEWTAP_MEDIUM-2SIDE  [PETAL-MEDIUM-2SIDE]  65.53,224.98 270 top
JP316  SEWTAP_MEDIUM-2SIDE  [PETAL-MEDIUM-2SIDE]  73.15,224.98 90 top
JP317  SEWTAP_MEDIUM-2SIDE  [PETAL-MEDIUM-2SIDE]  65.53,233.47 270 top
JP318  SEWTAP_MEDIUM-2SIDE  [PETAL-MEDIUM-2SIDE]  73.15,233.47 90 top
JP319  SEWTAP_MEDIUM-2SIDE  [PETAL-MEDIUM-2SIDE]  65.53,241.95 270 top
JP320  SEWTAP_MEDIUM-2SIDE  [PETAL-MEDIUM-2SIDE]  73.15,241.95 90 top
JP321  SEWTAP_MEDIUM-2SIDE  [PETAL-MEDIUM-2SIDE]  83.31,208.02 270 top
JP322  SEWTAP_MEDIUM-2SIDE  [PETAL-MEDIUM-2SIDE]  90.93,208.02 90 top
JP323  SEWTAP_MEDIUM-2SIDE  [PETAL-MEDIUM-2SIDE]  83.31,216.5 270 top
JP324  SEWTAP_MEDIUM-2SIDE  [PETAL-MEDIUM-2SIDE]  90.93,216.5 90 top
JP325  SEWTAP_MEDIUM-2SIDE  [PETAL-MEDIUM-2SIDE]  83.31,224.98 270 top
JP326  SEWTAP_MEDIUM-2SIDE  [PETAL-MEDIUM-2SIDE]  90.93,224.98 90 top
JP327  SEWTAP_MEDIUM-2SIDE  [PETAL-MEDIUM-2SIDE]  83.31,233.47 270 top
JP328  SEWTAP_MEDIUM-2SIDE  [PETAL-MEDIUM-2SIDE]  90.93,233.47 90 top
JP329  SEWTAP_MEDIUM-2SIDE  [PETAL-MEDIUM-2SIDE]  83.31,241.95 270 top
JP330  SEWTAP_MEDIUM-2SIDE  [PETAL-MEDIUM-2SIDE]  90.93,241.95 90 top
JP331  SEWTAP_MEDIUM-2SIDE  [PETAL-MEDIUM-2SIDE]  101.09,208.02 270 top
JP332  SEWTAP_MEDIUM-2SIDE  [PETAL-MEDIUM-2SIDE]  108.71,208.02 90 top
JP333  SEWTAP_MEDIUM-2SIDE  [PETAL-MEDIUM-2SIDE]  101.09,216.5 270 top
JP334  SEWTAP_MEDIUM-2SIDE  [PETAL-MEDIUM-2SIDE]  108.71,216.5 90 top
JP335  SEWTAP_MEDIUM-2SIDE  [PETAL-MEDIUM-2SIDE]  101.09,224.98 270 top
JP336  SEWTAP_MEDIUM-2SIDE  [PETAL-MEDIUM-2SIDE]  108.71,224.98 90 top
JP337  SEWTAP_MEDIUM-2SIDE  [PETAL-MEDIUM-2SIDE]  101.09,233.47 270 top
JP338  SEWTAP_MEDIUM-2SIDE  [PETAL-MEDIUM-2SIDE]  108.71,233.47 90 top
JP339  SEWTAP_MEDIUM-2SIDE  [PETAL-MEDIUM-2SIDE]  101.09,241.95 270 top
JP340  SEWTAP_MEDIUM-2SIDE  [PETAL-MEDIUM-2SIDE]  108.71,241.95 90 top
JP341  SEWTAP_MEDIUM-2SIDE  [PETAL-MEDIUM-2SIDE]  118.87,208.02 270 top
JP342  SEWTAP_MEDIUM-2SIDE  [PETAL-MEDIUM-2SIDE]  126.49,208.02 90 top
JP343  SEWTAP_MEDIUM-2SIDE  [PETAL-MEDIUM-2SIDE]  118.87,216.5 270 top
JP344  SEWTAP_MEDIUM-2SIDE  [PETAL-MEDIUM-2SIDE]  126.49,216.5 90 top
JP345  SEWTAP_MEDIUM-2SIDE  [PETAL-MEDIUM-2SIDE]  118.87,224.98 270 top
JP346  SEWTAP_MEDIUM-2SIDE  [PETAL-MEDIUM-2SIDE]  126.49,224.98 90 top
JP347  SEWTAP_MEDIUM-2SIDE  [PETAL-MEDIUM-2SIDE]  118.87,233.47 270 top
JP348  SEWTAP_MEDIUM-2SIDE  [PETAL-MEDIUM-2SIDE]  126.49,233.47 90 top
JP349  SEWTAP_MEDIUM-2SIDE  [PETAL-MEDIUM-2SIDE]  118.87,241.95 270 top
JP350  SEWTAP_MEDIUM-2SIDE  [PETAL-MEDIUM-2SIDE]  126.49,241.95 90 top
S1  MOMENTARY-SWITCH-SPST-SMD-5.2-REDUNDANT  [TACTILE_SWITCH_SMD_5.2MM]  33.78,10.92 270 top
S2  MOMENTARY-SWITCH-SPST-SMD-5.2-REDUNDANT  [TACTILE_SWITCH_SMD_5.2MM]  16,19.4 270 top
S3  MOMENTARY-SWITCH-SPST-SMD-5.2-REDUNDANT  [TACTILE_SWITCH_SMD_5.2MM]  33.78,19.4 270 top
S4  MOMENTARY-SWITCH-SPST-SMD-5.2-REDUNDANT  [TACTILE_SWITCH_SMD_5.2MM]  16,10.92 270 top
S5  MOMENTARY-SWITCH-SPST-SMD-5.2-REDUNDANT  [TACTILE_SWITCH_SMD_5.2MM]  16,27.88 270 top
S6  MOMENTARY-SWITCH-SPST-SMD-5.2-REDUNDANT  [TACTILE_SWITCH_SMD_5.2MM]  33.78,27.88 270 top
S7  MOMENTARY-SWITCH-SPST-SMD-5.2-REDUNDANT  [TACTILE_SWITCH_SMD_5.2MM]  16,36.36 270 top
S8  MOMENTARY-SWITCH-SPST-SMD-5.2-REDUNDANT  [TACTILE_SWITCH_SMD_5.2MM]  33.78,36.36 270 top
S9  MOMENTARY-SWITCH-SPST-SMD-5.2-REDUNDANT  [TACTILE_SWITCH_SMD_5.2MM]  16,44.84 270 top
S10  MOMENTARY-SWITCH-SPST-SMD-5.2-REDUNDANT  [TACTILE_SWITCH_SMD_5.2MM]  33.78,44.84 270 top
S11  MOMENTARY-SWITCH-SPST-SMD-5.2-REDUNDANT  [TACTILE_SWITCH_SMD_5.2MM]  51.56,10.92 270 top
S12  MOMENTARY-SWITCH-SPST-SMD-5.2-REDUNDANT  [TACTILE_SWITCH_SMD_5.2MM]  51.56,19.4 270 top
S13  MOMENTARY-SWITCH-SPST-SMD-5.2-REDUNDANT  [TACTILE_SWITCH_SMD_5.2MM]  51.56,27.88 270 top
S14  MOMENTARY-SWITCH-SPST-SMD-5.2-REDUNDANT  [TACTILE_SWITCH_SMD_5.2MM]  51.56,36.36 270 top
S15  MOMENTARY-SWITCH-SPST-SMD-5.2-REDUNDANT  [TACTILE_SWITCH_SMD_5.2MM]  51.56,44.84 270 top
S16  MOMENTARY-SWITCH-SPST-SMD-5.2-REDUNDANT  [TACTILE_SWITCH_SMD_5.2MM]  69.34,10.92 270 top
S17  MOMENTARY-SWITCH-SPST-SMD-5.2-REDUNDANT  [TACTILE_SWITCH_SMD_5.2MM]  69.34,19.4 270 top
S18  MOMENTARY-SWITCH-SPST-SMD-5.2-REDUNDANT  [TACTILE_SWITCH_SMD_5.2MM]  69.34,27.88 270 top
S19  MOMENTARY-SWITCH-SPST-SMD-5.2-REDUNDANT  [TACTILE_SWITCH_SMD_5.2MM]  69.34,36.36 270 top
S20  MOMENTARY-SWITCH-SPST-SMD-5.2-REDUNDANT  [TACTILE_SWITCH_SMD_5.2MM]  69.34,44.84 270 top
S21  MOMENTARY-SWITCH-SPST-SMD-5.2-REDUNDANT  [TACTILE_SWITCH_SMD_5.2MM]  87.12,10.92 270 top
S22  MOMENTARY-SWITCH-SPST-SMD-5.2-REDUNDANT  [TACTILE_SWITCH_SMD_5.2MM]  87.12,19.4 270 top
S23  MOMENTARY-SWITCH-SPST-SMD-5.2-REDUNDANT  [TACTILE_SWITCH_SMD_5.2MM]  87.12,27.88 270 top
S24  MOMENTARY-SWITCH-SPST-SMD-5.2-REDUNDANT  [TACTILE_SWITCH_SMD_5.2MM]  87.12,36.36 270 top
S25  MOMENTARY-SWITCH-SPST-SMD-5.2-REDUNDANT  [TACTILE_SWITCH_SMD_5.2MM]  87.12,44.84 270 top
S26  MOMENTARY-SWITCH-SPST-SMD-5.2-REDUNDANT  [TACTILE_SWITCH_SMD_5.2MM]  104.9,10.92 270 top
S27  MOMENTARY-SWITCH-SPST-SMD-5.2-REDUNDANT  [TACTILE_SWITCH_SMD_5.2MM]  104.9,19.4 270 top
S28  MOMENTARY-SWITCH-SPST-SMD-5.2-REDUNDANT  [TACTILE_SWITCH_SMD_5.2MM]  104.9,27.88 270 top
S29  MOMENTARY-SWITCH-SPST-SMD-5.2-REDUNDANT  [TACTILE_SWITCH_SMD_5.2MM]  104.9,36.36 270 top
S30  MOMENTARY-SWITCH-SPST-SMD-5.2-REDUNDANT  [TACTILE_SWITCH_SMD_5.2MM]  104.9,44.84 270 top
S31  MOMENTARY-SWITCH-SPST-SMD-5.2-REDUNDANT  [TACTILE_SWITCH_SMD_5.2MM]  122.68,10.92 270 top
S32  MOMENTARY-SWITCH-SPST-SMD-5.2-REDUNDANT  [TACTILE_SWITCH_SMD_5.2MM]  122.68,19.4 270 top
S33  MOMENTARY-SWITCH-SPST-SMD-5.2-REDUNDANT  [TACTILE_SWITCH_SMD_5.2MM]  122.68,27.88 270 top
S34  MOMENTARY-SWITCH-SPST-SMD-5.2-REDUNDANT  [TACTILE_SWITCH_SMD_5.2MM]  122.68,36.36 270 top
S35  MOMENTARY-SWITCH-SPST-SMD-5.2-REDUNDANT  [TACTILE_SWITCH_SMD_5.2MM]  122.68,44.84 270 top
S36  MOMENTARY-SWITCH-SPST-SMD-5.2-REDUNDANT  [TACTILE_SWITCH_SMD_5.2MM]  16,60.19 270 top
S37  MOMENTARY-SWITCH-SPST-SMD-5.2-REDUNDANT  [TACTILE_SWITCH_SMD_5.2MM]  16,68.67 270 top
S38  MOMENTARY-SWITCH-SPST-SMD-5.2-REDUNDANT  [TACTILE_SWITCH_SMD_5.2MM]  16,77.16 270 top
S39  MOMENTARY-SWITCH-SPST-SMD-5.2-REDUNDANT  [TACTILE_SWITCH_SMD_5.2MM]  16,85.64 270 top
S40  MOMENTARY-SWITCH-SPST-SMD-5.2-REDUNDANT  [TACTILE_SWITCH_SMD_5.2MM]  16,94.12 270 top
S41  MOMENTARY-SWITCH-SPST-SMD-5.2-REDUNDANT  [TACTILE_SWITCH_SMD_5.2MM]  33.78,60.19 270 top
S42  MOMENTARY-SWITCH-SPST-SMD-5.2-REDUNDANT  [TACTILE_SWITCH_SMD_5.2MM]  33.78,68.67 270 top
S43  MOMENTARY-SWITCH-SPST-SMD-5.2-REDUNDANT  [TACTILE_SWITCH_SMD_5.2MM]  33.78,77.16 270 top
S44  MOMENTARY-SWITCH-SPST-SMD-5.2-REDUNDANT  [TACTILE_SWITCH_SMD_5.2MM]  33.78,85.64 270 top
S45  MOMENTARY-SWITCH-SPST-SMD-5.2-REDUNDANT  [TACTILE_SWITCH_SMD_5.2MM]  33.78,94.12 270 top
S46  MOMENTARY-SWITCH-SPST-SMD-5.2-REDUNDANT  [TACTILE_SWITCH_SMD_5.2MM]  51.56,60.19 270 top
S47  MOMENTARY-SWITCH-SPST-SMD-5.2-REDUNDANT  [TACTILE_SWITCH_SMD_5.2MM]  51.56,68.67 270 top
S48  MOMENTARY-SWITCH-SPST-SMD-5.2-REDUNDANT  [TACTILE_SWITCH_SMD_5.2MM]  51.56,77.16 270 top
S49  MOMENTARY-SWITCH-SPST-SMD-5.2-REDUNDANT  [TACTILE_SWITCH_SMD_5.2MM]  51.56,85.64 270 top
S50  MOMENTARY-SWITCH-SPST-SMD-5.2-REDUNDANT  [TACTILE_SWITCH_SMD_5.2MM]  51.56,94.12 270 top
S51  MOMENTARY-SWITCH-SPST-SMD-5.2-REDUNDANT  [TACTILE_SWITCH_SMD_5.2MM]  69.34,60.19 270 top
S52  MOMENTARY-SWITCH-SPST-SMD-5.2-REDUNDANT  [TACTILE_SWITCH_SMD_5.2MM]  69.34,68.67 270 top
S53  MOMENTARY-SWITCH-SPST-SMD-5.2-REDUNDANT  [TACTILE_SWITCH_SMD_5.2MM]  69.34,77.16 270 top
S54  MOMENTARY-SWITCH-SPST-SMD-5.2-REDUNDANT  [TACTILE_SWITCH_SMD_5.2MM]  69.34,85.64 270 top
S55  MOMENTARY-SWITCH-SPST-SMD-5.2-REDUNDANT  [TACTILE_SWITCH_SMD_5.2MM]  69.34,94.12 270 top
S56  MOMENTARY-SWITCH-SPST-SMD-5.2-REDUNDANT  [TACTILE_SWITCH_SMD_5.2MM]  87.12,60.19 270 top
S57  MOMENTARY-SWITCH-SPST-SMD-5.2-REDUNDANT  [TACTILE_SWITCH_SMD_5.2MM]  87.12,68.67 270 top
S58  MOMENTARY-SWITCH-SPST-SMD-5.2-REDUNDANT  [TACTILE_SWITCH_SMD_5.2MM]  87.12,77.16 270 top
S59  MOMENTARY-SWITCH-SPST-SMD-5.2-REDUNDANT  [TACTILE_SWITCH_SMD_5.2MM]  87.12,85.64 270 top
S60  MOMENTARY-SWITCH-SPST-SMD-5.2-REDUNDANT  [TACTILE_SWITCH_SMD_5.2MM]  87.12,94.12 270 top
S61  MOMENTARY-SWITCH-SPST-SMD-5.2-REDUNDANT  [TACTILE_SWITCH_SMD_5.2MM]  104.9,60.19 270 top
S62  MOMENTARY-SWITCH-SPST-SMD-5.2-REDUNDANT  [TACTILE_SWITCH_SMD_5.2MM]  104.9,68.67 270 top
S63  MOMENTARY-SWITCH-SPST-SMD-5.2-REDUNDANT  [TACTILE_SWITCH_SMD_5.2MM]  104.9,77.16 270 top
S64  MOMENTARY-SWITCH-SPST-SMD-5.2-REDUNDANT  [TACTILE_SWITCH_SMD_5.2MM]  104.9,85.64 270 top
S65  MOMENTARY-SWITCH-SPST-SMD-5.2-REDUNDANT  [TACTILE_SWITCH_SMD_5.2MM]  104.9,94.12 270 top
S66  MOMENTARY-SWITCH-SPST-SMD-5.2-REDUNDANT  [TACTILE_SWITCH_SMD_5.2MM]  122.68,60.19 270 top
S67  MOMENTARY-SWITCH-SPST-SMD-5.2-REDUNDANT  [TACTILE_SWITCH_SMD_5.2MM]  122.68,68.67 270 top
S68  MOMENTARY-SWITCH-SPST-SMD-5.2-REDUNDANT  [TACTILE_SWITCH_SMD_5.2MM]  122.68,77.16 270 top
S69  MOMENTARY-SWITCH-SPST-SMD-5.2-REDUNDANT  [TACTILE_SWITCH_SMD_5.2MM]  122.68,85.64 270 top
S70  MOMENTARY-SWITCH-SPST-SMD-5.2-REDUNDANT  [TACTILE_SWITCH_SMD_5.2MM]  122.68,94.12 270 top
S71  MOMENTARY-SWITCH-SPST-SMD-5.2-REDUNDANT  [TACTILE_SWITCH_SMD_5.2MM]  16,109.47 270 top
S72  MOMENTARY-SWITCH-SPST-SMD-5.2-REDUNDANT  [TACTILE_SWITCH_SMD_5.2MM]  16,117.95 270 top
S73  MOMENTARY-SWITCH-SPST-SMD-5.2-REDUNDANT  [TACTILE_SWITCH_SMD_5.2MM]  16,126.43 270 top
S74  MOMENTARY-SWITCH-SPST-SMD-5.2-REDUNDANT  [TACTILE_SWITCH_SMD_5.2MM]  16,134.91 270 top
S75  MOMENTARY-SWITCH-SPST-SMD-5.2-REDUNDANT  [TACTILE_SWITCH_SMD_5.2MM]  16,143.39 270 top
S76  MOMENTARY-SWITCH-SPST-SMD-5.2-REDUNDANT  [TACTILE_SWITCH_SMD_5.2MM]  33.78,109.47 270 top
S77  MOMENTARY-SWITCH-SPST-SMD-5.2-REDUNDANT  [TACTILE_SWITCH_SMD_5.2MM]  33.78,117.95 270 top
S78  MOMENTARY-SWITCH-SPST-SMD-5.2-REDUNDANT  [TACTILE_SWITCH_SMD_5.2MM]  33.78,126.43 270 top
S79  MOMENTARY-SWITCH-SPST-SMD-5.2-REDUNDANT  [TACTILE_SWITCH_SMD_5.2MM]  33.78,134.91 270 top
S80  MOMENTARY-SWITCH-SPST-SMD-5.2-REDUNDANT  [TACTILE_SWITCH_SMD_5.2MM]  33.78,143.39 270 top
S81  MOMENTARY-SWITCH-SPST-SMD-5.2-REDUNDANT  [TACTILE_SWITCH_SMD_5.2MM]  51.56,109.47 270 top
S82  MOMENTARY-SWITCH-SPST-SMD-5.2-REDUNDANT  [TACTILE_SWITCH_SMD_5.2MM]  51.56,117.95 270 top
S83  MOMENTARY-SWITCH-SPST-SMD-5.2-REDUNDANT  [TACTILE_SWITCH_SMD_5.2MM]  51.56,126.43 270 top
S84  MOMENTARY-SWITCH-SPST-SMD-5.2-REDUNDANT  [TACTILE_SWITCH_SMD_5.2MM]  51.56,134.91 270 top
S85  MOMENTARY-SWITCH-SPST-SMD-5.2-REDUNDANT  [TACTILE_SWITCH_SMD_5.2MM]  51.56,143.39 270 top
S86  MOMENTARY-SWITCH-SPST-SMD-5.2-REDUNDANT  [TACTILE_SWITCH_SMD_5.2MM]  69.34,109.47 270 top
S87  MOMENTARY-SWITCH-SPST-SMD-5.2-REDUNDANT  [TACTILE_SWITCH_SMD_5.2MM]  69.34,117.95 270 top
S88  MOMENTARY-SWITCH-SPST-SMD-5.2-REDUNDANT  [TACTILE_SWITCH_SMD_5.2MM]  69.34,126.43 270 top
S89  MOMENTARY-SWITCH-SPST-SMD-5.2-REDUNDANT  [TACTILE_SWITCH_SMD_5.2MM]  69.34,134.91 270 top
S90  MOMENTARY-SWITCH-SPST-SMD-5.2-REDUNDANT  [TACTILE_SWITCH_SMD_5.2MM]  69.34,143.39 270 top
S91  MOMENTARY-SWITCH-SPST-SMD-5.2-REDUNDANT  [TACTILE_SWITCH_SMD_5.2MM]  87.12,109.47 270 top
S92  MOMENTARY-SWITCH-SPST-SMD-5.2-REDUNDANT  [TACTILE_SWITCH_SMD_5.2MM]  87.12,117.95 270 top
S93  MOMENTARY-SWITCH-SPST-SMD-5.2-REDUNDANT  [TACTILE_SWITCH_SMD_5.2MM]  87.12,126.43 270 top
S94  MOMENTARY-SWITCH-SPST-SMD-5.2-REDUNDANT  [TACTILE_SWITCH_SMD_5.2MM]  87.12,134.91 270 top
S95  MOMENTARY-SWITCH-SPST-SMD-5.2-REDUNDANT  [TACTILE_SWITCH_SMD_5.2MM]  87.12,143.39 270 top
S96  MOMENTARY-SWITCH-SPST-SMD-5.2-REDUNDANT  [TACTILE_SWITCH_SMD_5.2MM]  104.9,109.47 270 top
S97  MOMENTARY-SWITCH-SPST-SMD-5.2-REDUNDANT  [TACTILE_SWITCH_SMD_5.2MM]  104.9,117.95 270 top
S98  MOMENTARY-SWITCH-SPST-SMD-5.2-REDUNDANT  [TACTILE_SWITCH_SMD_5.2MM]  104.9,126.43 270 top
S99  MOMENTARY-SWITCH-SPST-SMD-5.2-REDUNDANT  [TACTILE_SWITCH_SMD_5.2MM]  104.9,134.91 270 top
S100  MOMENTARY-SWITCH-SPST-SMD-5.2-REDUNDANT  [TACTILE_SWITCH_SMD_5.2MM]  104.9,143.39 270 top
S101  MOMENTARY-SWITCH-SPST-SMD-5.2-REDUNDANT  [TACTILE_SWITCH_SMD_5.2MM]  122.68,109.47 270 top
S102  MOMENTARY-SWITCH-SPST-SMD-5.2-REDUNDANT  [TACTILE_SWITCH_SMD_5.2MM]  122.68,117.95 270 top
S103  MOMENTARY-SWITCH-SPST-SMD-5.2-REDUNDANT  [TACTILE_SWITCH_SMD_5.2MM]  122.68,126.43 270 top
S104  MOMENTARY-SWITCH-SPST-SMD-5.2-REDUNDANT  [TACTILE_SWITCH_SMD_5.2MM]  122.68,134.91 270 top
S105  MOMENTARY-SWITCH-SPST-SMD-5.2-REDUNDANT  [TACTILE_SWITCH_SMD_5.2MM]  122.68,143.39 270 top
S106  MOMENTARY-SWITCH-SPST-SMD-5.2-REDUNDANT  [TACTILE_SWITCH_SMD_5.2MM]  16,158.75 270 top
S107  MOMENTARY-SWITCH-SPST-SMD-5.2-REDUNDANT  [TACTILE_SWITCH_SMD_5.2MM]  16,167.23 270 top
S108  MOMENTARY-SWITCH-SPST-SMD-5.2-REDUNDANT  [TACTILE_SWITCH_SMD_5.2MM]  16,175.71 270 top
S109  MOMENTARY-SWITCH-SPST-SMD-5.2-REDUNDANT  [TACTILE_SWITCH_SMD_5.2MM]  16,184.19 270 top
S110  MOMENTARY-SWITCH-SPST-SMD-5.2-REDUNDANT  [TACTILE_SWITCH_SMD_5.2MM]  16,192.67 270 top
S111  MOMENTARY-SWITCH-SPST-SMD-5.2-REDUNDANT  [TACTILE_SWITCH_SMD_5.2MM]  33.78,158.75 270 top
S112  MOMENTARY-SWITCH-SPST-SMD-5.2-REDUNDANT  [TACTILE_SWITCH_SMD_5.2MM]  33.78,167.23 270 top
S113  MOMENTARY-SWITCH-SPST-SMD-5.2-REDUNDANT  [TACTILE_SWITCH_SMD_5.2MM]  33.78,175.71 270 top
S114  MOMENTARY-SWITCH-SPST-SMD-5.2-REDUNDANT  [TACTILE_SWITCH_SMD_5.2MM]  33.78,184.19 270 top
S115  MOMENTARY-SWITCH-SPST-SMD-5.2-REDUNDANT  [TACTILE_SWITCH_SMD_5.2MM]  33.78,192.67 270 top
S116  MOMENTARY-SWITCH-SPST-SMD-5.2-REDUNDANT  [TACTILE_SWITCH_SMD_5.2MM]  51.56,158.75 270 top
S117  MOMENTARY-SWITCH-SPST-SMD-5.2-REDUNDANT  [TACTILE_SWITCH_SMD_5.2MM]  51.56,167.23 270 top
S118  MOMENTARY-SWITCH-SPST-SMD-5.2-REDUNDANT  [TACTILE_SWITCH_SMD_5.2MM]  51.56,175.71 270 top
S119  MOMENTARY-SWITCH-SPST-SMD-5.2-REDUNDANT  [TACTILE_SWITCH_SMD_5.2MM]  51.56,184.19 270 top
S120  MOMENTARY-SWITCH-SPST-SMD-5.2-REDUNDANT  [TACTILE_SWITCH_SMD_5.2MM]  51.56,192.67 270 top
S121  MOMENTARY-SWITCH-SPST-SMD-5.2-REDUNDANT  [TACTILE_SWITCH_SMD_5.2MM]  69.34,158.75 270 top
S122  MOMENTARY-SWITCH-SPST-SMD-5.2-REDUNDANT  [TACTILE_SWITCH_SMD_5.2MM]  69.34,167.23 270 top
S123  MOMENTARY-SWITCH-SPST-SMD-5.2-REDUNDANT  [TACTILE_SWITCH_SMD_5.2MM]  69.34,175.71 270 top
S124  MOMENTARY-SWITCH-SPST-SMD-5.2-REDUNDANT  [TACTILE_SWITCH_SMD_5.2MM]  69.34,184.19 270 top
S125  MOMENTARY-SWITCH-SPST-SMD-5.2-REDUNDANT  [TACTILE_SWITCH_SMD_5.2MM]  69.34,192.67 270 top
S126  MOMENTARY-SWITCH-SPST-SMD-5.2-REDUNDANT  [TACTILE_SWITCH_SMD_5.2MM]  87.12,158.75 270 top
S127  MOMENTARY-SWITCH-SPST-SMD-5.2-REDUNDANT  [TACTILE_SWITCH_SMD_5.2MM]  87.12,167.23 270 top
S128  MOMENTARY-SWITCH-SPST-SMD-5.2-REDUNDANT  [TACTILE_SWITCH_SMD_5.2MM]  87.12,175.71 270 top
S129  MOMENTARY-SWITCH-SPST-SMD-5.2-REDUNDANT  [TACTILE_SWITCH_SMD_5.2MM]  87.12,184.19 270 top
S130  MOMENTARY-SWITCH-SPST-SMD-5.2-REDUNDANT  [TACTILE_SWITCH_SMD_5.2MM]  87.12,192.67 270 top
S131  MOMENTARY-SWITCH-SPST-SMD-5.2-REDUNDANT  [TACTILE_SWITCH_SMD_5.2MM]  104.9,158.75 270 top
S132  MOMENTARY-SWITCH-SPST-SMD-5.2-REDUNDANT  [TACTILE_SWITCH_SMD_5.2MM]  104.9,167.23 270 top
S133  MOMENTARY-SWITCH-SPST-SMD-5.2-REDUNDANT  [TACTILE_SWITCH_SMD_5.2MM]  104.9,175.71 270 top
S134  MOMENTARY-SWITCH-SPST-SMD-5.2-REDUNDANT  [TACTILE_SWITCH_SMD_5.2MM]  104.9,184.19 270 top
S135  MOMENTARY-SWITCH-SPST-SMD-5.2-REDUNDANT  [TACTILE_SWITCH_SMD_5.2MM]  104.9,192.67 270 top
S136  MOMENTARY-SWITCH-SPST-SMD-5.2-REDUNDANT  [TACTILE_SWITCH_SMD_5.2MM]  122.68,158.75 270 top
S137  MOMENTARY-SWITCH-SPST-SMD-5.2-REDUNDANT  [TACTILE_SWITCH_SMD_5.2MM]  122.68,167.23 270 top
S138  MOMENTARY-SWITCH-SPST-SMD-5.2-REDUNDANT  [TACTILE_SWITCH_SMD_5.2MM]  122.68,175.71 270 top
S139  MOMENTARY-SWITCH-SPST-SMD-5.2-REDUNDANT  [TACTILE_SWITCH_SMD_5.2MM]  122.68,184.19 270 top
S140  MOMENTARY-SWITCH-SPST-SMD-5.2-REDUNDANT  [TACTILE_SWITCH_SMD_5.2MM]  122.68,192.67 270 top
S141  MOMENTARY-SWITCH-SPST-SMD-5.2-REDUNDANT  [TACTILE_SWITCH_SMD_5.2MM]  16,208.02 270 top
S142  MOMENTARY-SWITCH-SPST-SMD-5.2-REDUNDANT  [TACTILE_SWITCH_SMD_5.2MM]  16,216.5 270 top
S143  MOMENTARY-SWITCH-SPST-SMD-5.2-REDUNDANT  [TACTILE_SWITCH_SMD_5.2MM]  16,224.98 270 top
S144  MOMENTARY-SWITCH-SPST-SMD-5.2-REDUNDANT  [TACTILE_SWITCH_SMD_5.2MM]  16,233.47 270 top
S145  MOMENTARY-SWITCH-SPST-SMD-5.2-REDUNDANT  [TACTILE_SWITCH_SMD_5.2MM]  16,241.95 270 top
S146  MOMENTARY-SWITCH-SPST-SMD-5.2-REDUNDANT  [TACTILE_SWITCH_SMD_5.2MM]  33.78,208.02 270 top
S147  MOMENTARY-SWITCH-SPST-SMD-5.2-REDUNDANT  [TACTILE_SWITCH_SMD_5.2MM]  33.78,216.5 270 top
S148  MOMENTARY-SWITCH-SPST-SMD-5.2-REDUNDANT  [TACTILE_SWITCH_SMD_5.2MM]  33.78,224.98 270 top
S149  MOMENTARY-SWITCH-SPST-SMD-5.2-REDUNDANT  [TACTILE_SWITCH_SMD_5.2MM]  33.78,233.47 270 top
S150  MOMENTARY-SWITCH-SPST-SMD-5.2-REDUNDANT  [TACTILE_SWITCH_SMD_5.2MM]  33.78,241.95 270 top
S151  MOMENTARY-SWITCH-SPST-SMD-5.2-REDUNDANT  [TACTILE_SWITCH_SMD_5.2MM]  51.56,208.02 270 top
S152  MOMENTARY-SWITCH-SPST-SMD-5.2-REDUNDANT  [TACTILE_SWITCH_SMD_5.2MM]  51.56,216.5 270 top
S153  MOMENTARY-SWITCH-SPST-SMD-5.2-REDUNDANT  [TACTILE_SWITCH_SMD_5.2MM]  51.56,224.98 270 top
S154  MOMENTARY-SWITCH-SPST-SMD-5.2-REDUNDANT  [TACTILE_SWITCH_SMD_5.2MM]  51.56,233.47 270 top
S155  MOMENTARY-SWITCH-SPST-SMD-5.2-REDUNDANT  [TACTILE_SWITCH_SMD_5.2MM]  51.56,241.95 270 top
S156  MOMENTARY-SWITCH-SPST-SMD-5.2-REDUNDANT  [TACTILE_SWITCH_SMD_5.2MM]  69.34,208.02 270 top
S157  MOMENTARY-SWITCH-SPST-SMD-5.2-REDUNDANT  [TACTILE_SWITCH_SMD_5.2MM]  69.34,216.5 270 top
S158  MOMENTARY-SWITCH-SPST-SMD-5.2-REDUNDANT  [TACTILE_SWITCH_SMD_5.2MM]  69.34,224.98 270 top
S159  MOMENTARY-SWITCH-SPST-SMD-5.2-REDUNDANT  [TACTILE_SWITCH_SMD_5.2MM]  69.34,233.47 270 top
S160  MOMENTARY-SWITCH-SPST-SMD-5.2-REDUNDANT  [TACTILE_SWITCH_SMD_5.2MM]  69.34,241.95 270 top
S161  MOMENTARY-SWITCH-SPST-SMD-5.2-REDUNDANT  [TACTILE_SWITCH_SMD_5.2MM]  87.12,208.02 270 top
S162  MOMENTARY-SWITCH-SPST-SMD-5.2-REDUNDANT  [TACTILE_SWITCH_SMD_5.2MM]  87.12,216.5 270 top
S163  MOMENTARY-SWITCH-SPST-SMD-5.2-REDUNDANT  [TACTILE_SWITCH_SMD_5.2MM]  87.12,224.98 270 top
S164  MOMENTARY-SWITCH-SPST-SMD-5.2-REDUNDANT  [TACTILE_SWITCH_SMD_5.2MM]  87.12,233.47 270 top
S165  MOMENTARY-SWITCH-SPST-SMD-5.2-REDUNDANT  [TACTILE_SWITCH_SMD_5.2MM]  87.12,241.95 270 top
S166  MOMENTARY-SWITCH-SPST-SMD-5.2-REDUNDANT  [TACTILE_SWITCH_SMD_5.2MM]  104.9,208.02 270 top
S167  MOMENTARY-SWITCH-SPST-SMD-5.2-REDUNDANT  [TACTILE_SWITCH_SMD_5.2MM]  104.9,216.5 270 top
S168  MOMENTARY-SWITCH-SPST-SMD-5.2-REDUNDANT  [TACTILE_SWITCH_SMD_5.2MM]  104.9,224.98 270 top
S169  MOMENTARY-SWITCH-SPST-SMD-5.2-REDUNDANT  [TACTILE_SWITCH_SMD_5.2MM]  104.9,233.47 270 top
S170  MOMENTARY-SWITCH-SPST-SMD-5.2-REDUNDANT  [TACTILE_SWITCH_SMD_5.2MM]  104.9,241.95 270 top
S171  MOMENTARY-SWITCH-SPST-SMD-5.2-REDUNDANT  [TACTILE_SWITCH_SMD_5.2MM]  122.68,208.02 270 top
S172  MOMENTARY-SWITCH-SPST-SMD-5.2-REDUNDANT  [TACTILE_SWITCH_SMD_5.2MM]  122.68,216.5 270 top
S173  MOMENTARY-SWITCH-SPST-SMD-5.2-REDUNDANT  [TACTILE_SWITCH_SMD_5.2MM]  122.68,224.98 270 top
S174  MOMENTARY-SWITCH-SPST-SMD-5.2-REDUNDANT  [TACTILE_SWITCH_SMD_5.2MM]  122.68,233.47 270 top
S175  MOMENTARY-SWITCH-SPST-SMD-5.2-REDUNDANT  [TACTILE_SWITCH_SMD_5.2MM]  122.68,241.95 270 top
U$1  [LOGO-L]  33.78,10.9 0 bottom
U$2  [LOGO-L]  16,19.38 0 bottom
U$3  [LOGO-L]  33.78,19.38 0 bottom
U$4  [LOGO-L]  16,27.86 0 bottom
U$5  [LOGO-L]  33.78,27.86 0 bottom
U$6  [LOGO-L]  16,36.35 0 bottom
U$7  [LOGO-L]  33.78,36.35 0 bottom
U$8  [LOGO-L]  16,44.83 0 bottom
U$9  [LOGO-L]  33.78,44.83 0 bottom
U$10  [LOGO-L]  51.56,10.9 0 bottom
U$11  [LOGO-L]  51.56,19.38 0 bottom
U$12  [LOGO-L]  51.56,27.86 0 bottom
U$13  [LOGO-L]  51.56,36.35 0 bottom
U$14  [LOGO-L]  51.56,44.83 0 bottom
U$15  [LOGO-L]  69.34,10.9 0 bottom
U$16  [LOGO-L]  69.34,19.38 0 bottom
U$17  [LOGO-L]  69.34,27.86 0 bottom
U$18  [LOGO-L]  69.34,36.35 0 bottom
U$19  [LOGO-L]  69.34,44.83 0 bottom
U$20  [LOGO-L]  87.12,10.9 0 bottom
U$21  [LOGO-L]  87.12,19.38 0 bottom
U$22  [LOGO-L]  87.12,27.86 0 bottom
U$23  [LOGO-L]  87.12,36.35 0 bottom
U$24  [LOGO-L]  87.12,44.83 0 bottom
U$25  [LOGO-L]  104.9,10.9 0 bottom
U$26  [LOGO-L]  104.9,19.38 0 bottom
U$27  [LOGO-L]  104.9,27.86 0 bottom
U$28  [LOGO-L]  104.9,36.35 0 bottom
U$29  [LOGO-L]  104.9,44.83 0 bottom
U$30  [LOGO-L]  122.68,10.9 0 bottom
U$31  [LOGO-L]  122.68,19.38 0 bottom
U$32  [LOGO-L]  122.68,27.86 0 bottom
U$33  [LOGO-L]  122.68,36.35 0 bottom
U$34  [LOGO-L]  122.68,44.83 0 bottom
U$35  [LOGO-L]  16,60.18 0 bottom
U$36  [LOGO-L]  16,68.66 0 bottom
U$37  [LOGO-L]  16,77.14 0 bottom
U$38  [LOGO-L]  16,85.62 0 bottom
U$39  [LOGO-L]  16,94.1 0 bottom
U$40  [LOGO-L]  33.78,60.18 0 bottom
U$41  [LOGO-L]  33.78,68.66 0 bottom
U$42  [LOGO-L]  33.78,77.14 0 bottom
U$43  [LOGO-L]  33.78,85.62 0 bottom
U$44  [LOGO-L]  33.78,94.1 0 bottom
U$45  [LOGO-L]  16,10.9 0 bottom
U$46  [LOGO-L]  51.56,60.18 0 bottom
U$47  [LOGO-L]  51.56,68.66 0 bottom
U$48  [LOGO-L]  51.56,77.14 0 bottom
U$49  [LOGO-L]  51.56,85.62 0 bottom
U$50  [LOGO-L]  51.56,94.1 0 bottom
U$51  [LOGO-L]  69.34,60.18 0 bottom
U$52  [LOGO-L]  69.34,68.66 0 bottom
U$53  [LOGO-L]  69.34,77.14 0 bottom
U$54  [LOGO-L]  69.34,85.62 0 bottom
U$55  [LOGO-L]  69.34,94.1 0 bottom
U$56  [LOGO-L]  87.12,60.18 0 bottom
U$57  [LOGO-L]  87.12,68.66 0 bottom
U$58  [LOGO-L]  87.12,77.14 0 bottom
U$59  [LOGO-L]  87.12,85.62 0 bottom
U$60  [LOGO-L]  87.12,94.1 0 bottom
U$61  [LOGO-L]  104.9,60.18 0 bottom
U$62  [LOGO-L]  104.9,68.66 0 bottom
U$63  [LOGO-L]  104.9,77.14 0 bottom
U$64  [LOGO-L]  104.9,85.62 0 bottom
U$65  [LOGO-L]  104.9,94.1 0 bottom
U$66  [LOGO-L]  122.68,60.18 0 bottom
U$67  [LOGO-L]  122.68,68.66 0 bottom
U$68  [LOGO-L]  122.68,77.14 0 bottom
U$69  [LOGO-L]  122.68,85.62 0 bottom
U$70  [LOGO-L]  122.68,94.1 0 bottom
U$71  [LOGO-L]  16,109.45 0 bottom
U$72  [LOGO-L]  16,117.94 0 bottom
U$73  [LOGO-L]  16,126.42 0 bottom
U$74  [LOGO-L]  16,134.9 0 bottom
U$75  [LOGO-L]  16,143.38 0 bottom
U$76  [LOGO-L]  33.78,109.45 0 bottom
U$77  [LOGO-L]  33.78,117.94 0 bottom
U$78  [LOGO-L]  33.78,126.42 0 bottom
U$79  [LOGO-L]  33.78,134.9 0 bottom
U$80  [LOGO-L]  33.78,143.38 0 bottom
U$81  [LOGO-L]  51.56,109.45 0 bottom
U$82  [LOGO-L]  51.56,117.94 0 bottom
U$83  [LOGO-L]  51.56,126.42 0 bottom
U$84  [LOGO-L]  51.56,134.9 0 bottom
U$85  [LOGO-L]  51.56,143.38 0 bottom
U$86  [LOGO-L]  69.34,109.45 0 bottom
U$87  [LOGO-L]  69.34,117.94 0 bottom
U$88  [LOGO-L]  69.34,126.42 0 bottom
U$89  [LOGO-L]  69.34,134.9 0 bottom
U$90  [LOGO-L]  69.34,143.38 0 bottom
U$91  [LOGO-L]  87.12,109.45 0 bottom
U$92  [LOGO-L]  87.12,117.94 0 bottom
U$93  [LOGO-L]  87.12,126.42 0 bottom
U$94  [LOGO-L]  87.12,134.9 0 bottom
U$95  [LOGO-L]  87.12,143.38 0 bottom
U$96  [LOGO-L]  104.9,109.45 0 bottom
U$97  [LOGO-L]  104.9,117.94 0 bottom
U$98  [LOGO-L]  104.9,126.42 0 bottom
U$99  [LOGO-L]  104.9,134.9 0 bottom
U$100  [LOGO-L]  104.9,143.38 0 bottom
U$101  [LOGO-L]  122.68,109.45 0 bottom
U$102  [LOGO-L]  122.68,117.94 0 bottom
U$103  [LOGO-L]  122.68,126.42 0 bottom
U$104  [LOGO-L]  122.68,134.9 0 bottom
U$105  [LOGO-L]  122.68,143.38 0 bottom
U$106  [LOGO-L]  16,158.73 0 bottom
U$107  [LOGO-L]  16,167.21 0 bottom
U$108  [LOGO-L]  16,175.69 0 bottom
U$109  [LOGO-L]  16,184.17 0 bottom
U$110  [LOGO-L]  16,192.66 0 bottom
U$111  [LOGO-L]  33.78,158.73 0 bottom
U$112  [LOGO-L]  33.78,167.21 0 bottom
U$113  [LOGO-L]  33.78,175.69 0 bottom
U$114  [LOGO-L]  33.78,184.17 0 bottom
U$115  [LOGO-L]  33.78,192.66 0 bottom
U$116  [LOGO-L]  51.56,158.73 0 bottom
U$117  [LOGO-L]  51.56,167.21 0 bottom
U$118  [LOGO-L]  51.56,175.69 0 bottom
U$119  [LOGO-L]  51.56,184.17 0 bottom
U$120  [LOGO-L]  51.56,192.66 0 bottom
U$121  [LOGO-L]  69.34,158.73 0 bottom
U$122  [LOGO-L]  69.34,167.21 0 bottom
U$123  [LOGO-L]  69.34,175.69 0 bottom
U$124  [LOGO-L]  69.34,184.17 0 bottom
U$125  [LOGO-L]  69.34,192.66 0 bottom
U$126  [LOGO-L]  87.12,158.73 0 bottom
U$127  [LOGO-L]  87.12,167.21 0 bottom
U$128  [LOGO-L]  87.12,175.69 0 bottom
U$129  [LOGO-L]  87.12,184.17 0 bottom
U$130  [LOGO-L]  87.12,192.66 0 bottom
U$131  [LOGO-L]  104.9,158.73 0 bottom
U$132  [LOGO-L]  104.9,167.21 0 bottom
U$133  [LOGO-L]  104.9,175.69 0 bottom
U$134  [LOGO-L]  104.9,184.17 0 bottom
U$135  [LOGO-L]  104.9,192.66 0 bottom
U$136  [LOGO-L]  122.68,158.73 0 bottom
U$137  [LOGO-L]  122.68,167.21 0 bottom
U$138  [LOGO-L]  122.68,175.69 0 bottom
U$139  [LOGO-L]  122.68,184.17 0 bottom
U$140  [LOGO-L]  122.68,192.66 0 bottom
U$141  [LOGO-L]  16,208.01 0 bottom
U$142  [LOGO-L]  16,216.49 0 bottom
U$143  [LOGO-L]  16,224.97 0 bottom
U$144  [LOGO-L]  16,233.45 0 bottom
U$145  [LOGO-L]  16,241.93 0 bottom
U$146  [LOGO-L]  33.78,208.01 0 bottom
U$147  [LOGO-L]  33.78,216.49 0 bottom
U$148  [LOGO-L]  33.78,224.97 0 bottom
U$149  [LOGO-L]  33.78,233.45 0 bottom
U$150  [LOGO-L]  33.78,241.93 0 bottom
U$151  [LOGO-L]  51.56,208.01 0 bottom
U$152  [LOGO-L]  51.56,216.49 0 bottom
U$153  [LOGO-L]  51.56,224.97 0 bottom
U$154  [LOGO-L]  51.56,233.45 0 bottom
U$155  [LOGO-L]  51.56,241.93 0 bottom
U$156  [LOGO-L]  69.34,208.01 0 bottom
U$157  [LOGO-L]  69.34,216.49 0 bottom
U$158  [LOGO-L]  69.34,224.97 0 bottom
U$159  [LOGO-L]  69.34,233.45 0 bottom
U$160  [LOGO-L]  69.34,241.93 0 bottom
U$161  [LOGO-L]  87.12,208.01 0 bottom
U$162  [LOGO-L]  87.12,216.49 0 bottom
U$163  [LOGO-L]  87.12,224.97 0 bottom
U$164  [LOGO-L]  87.12,233.45 0 bottom
U$165  [LOGO-L]  87.12,241.93 0 bottom
U$166  [LOGO-L]  104.9,208.01 0 bottom
U$167  [LOGO-L]  104.9,216.49 0 bottom
U$168  [LOGO-L]  104.9,224.97 0 bottom
U$169  [LOGO-L]  104.9,233.45 0 bottom
U$170  [LOGO-L]  104.9,241.93 0 bottom
U$171  [LOGO-L]  122.68,208.01 0 bottom
U$172  [LOGO-L]  122.68,216.49 0 bottom
U$173  [LOGO-L]  122.68,224.97 0 bottom
U$174  [LOGO-L]  122.68,233.45 0 bottom
U$175  [LOGO-L]  122.68,241.93 0 bottom

## Library data of the parts
E$1 = SparkFun-Retired
E$15 E$16 = SparkFun-Aesthetics
JP1-JP350 U$1-U$175 = LilyPad-Wearables
S1-S175 = SparkFun-Switches; PROD_ID: SWCH-08247; SF_SKU: COM-08720